# Altium PCB PCB.PcbDoc
Units mm, origin at the board's own origin, x right, y up, seen from the top; angles counter-clockwise.
Board outline 51.03 x 33.66 mm, 6 copper layers (Top Layer, Int1 (GND), Int2 (Sign), Int3 (Sign), Int4 (PWR), Bottom Layer), stack 1.551 mm thick; 35 components, 63 nets, 197 pads, 38 vias.
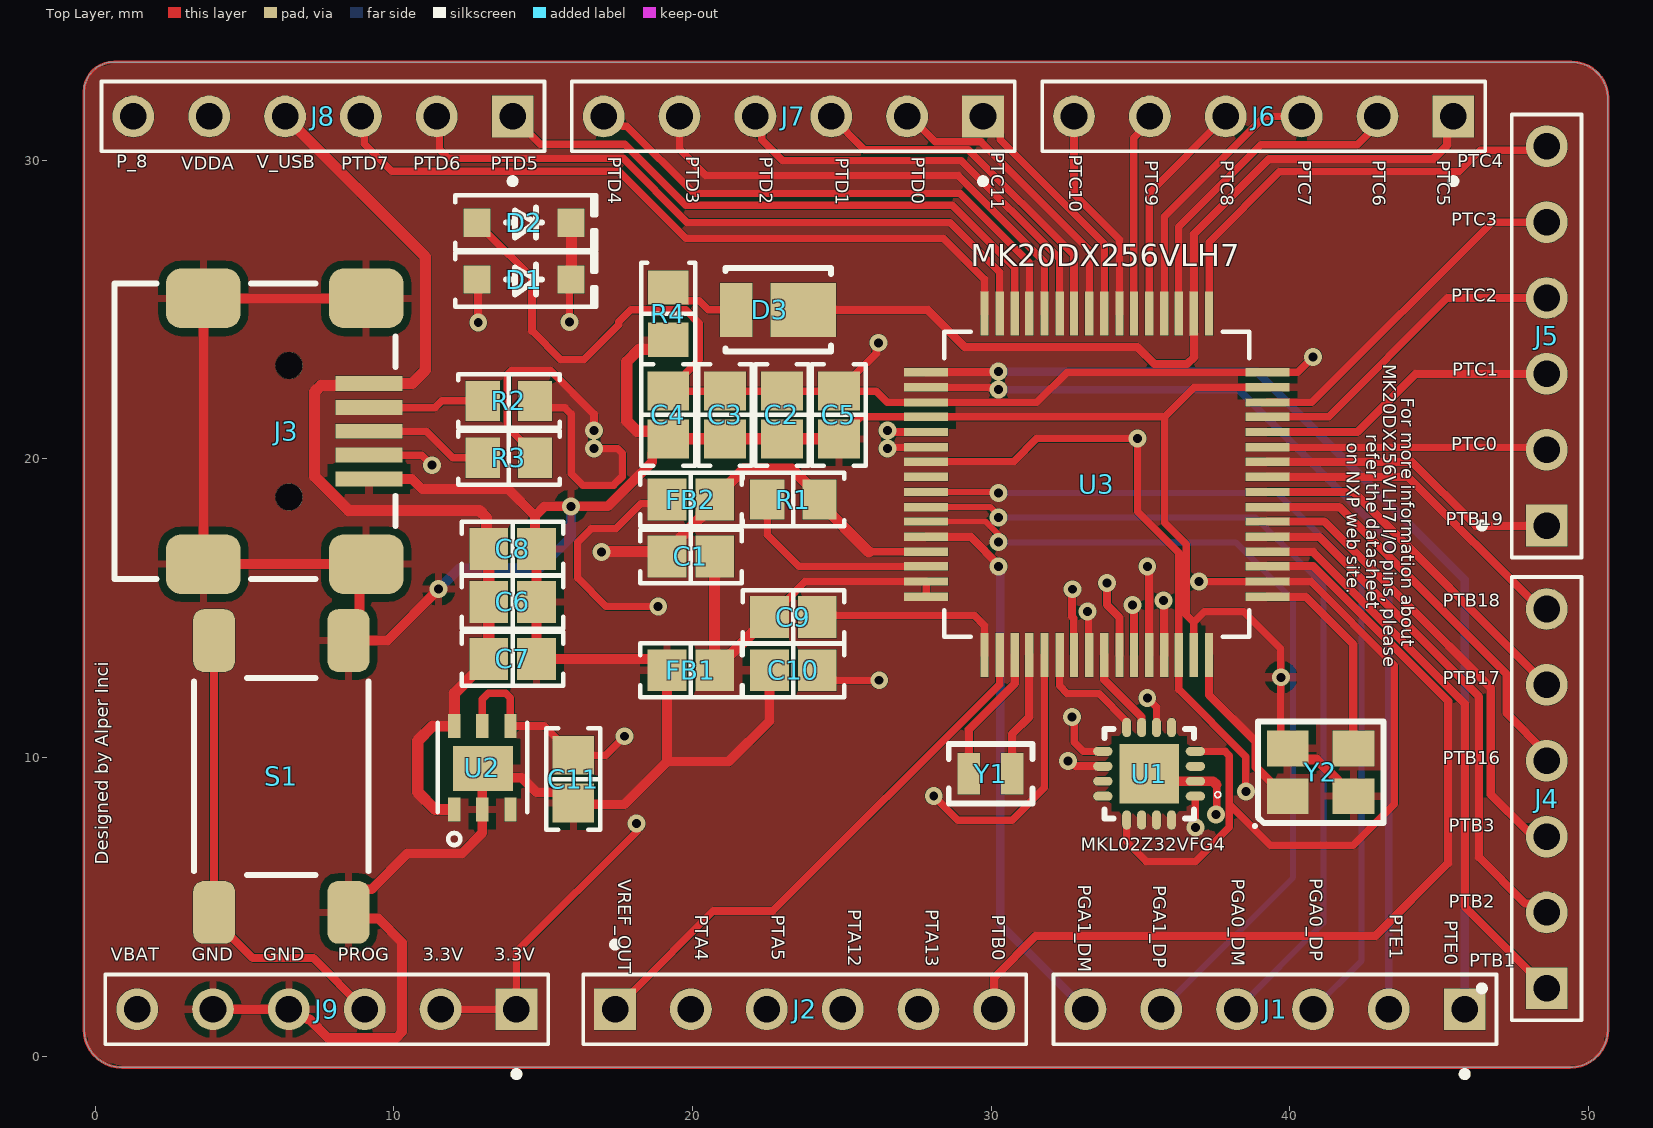
[diagram p0: Top Layer view]
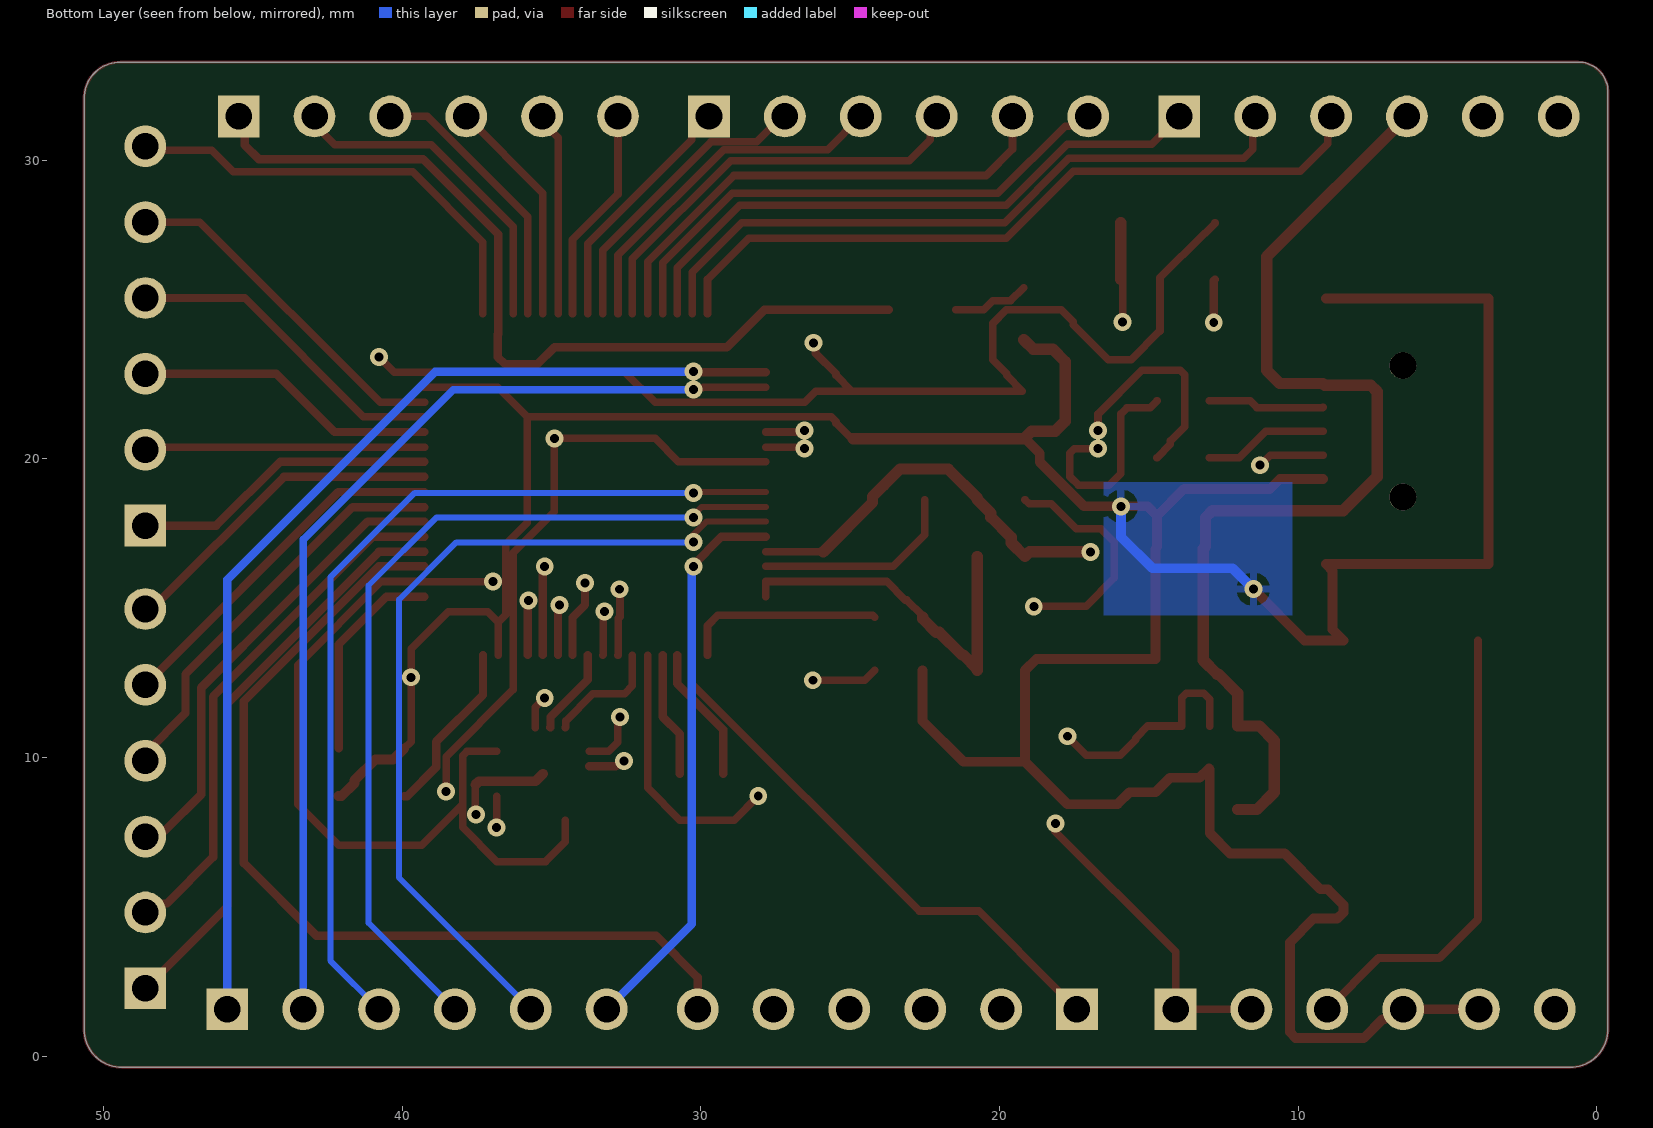
[diagram p1: Bottom Layer view, seen from below]
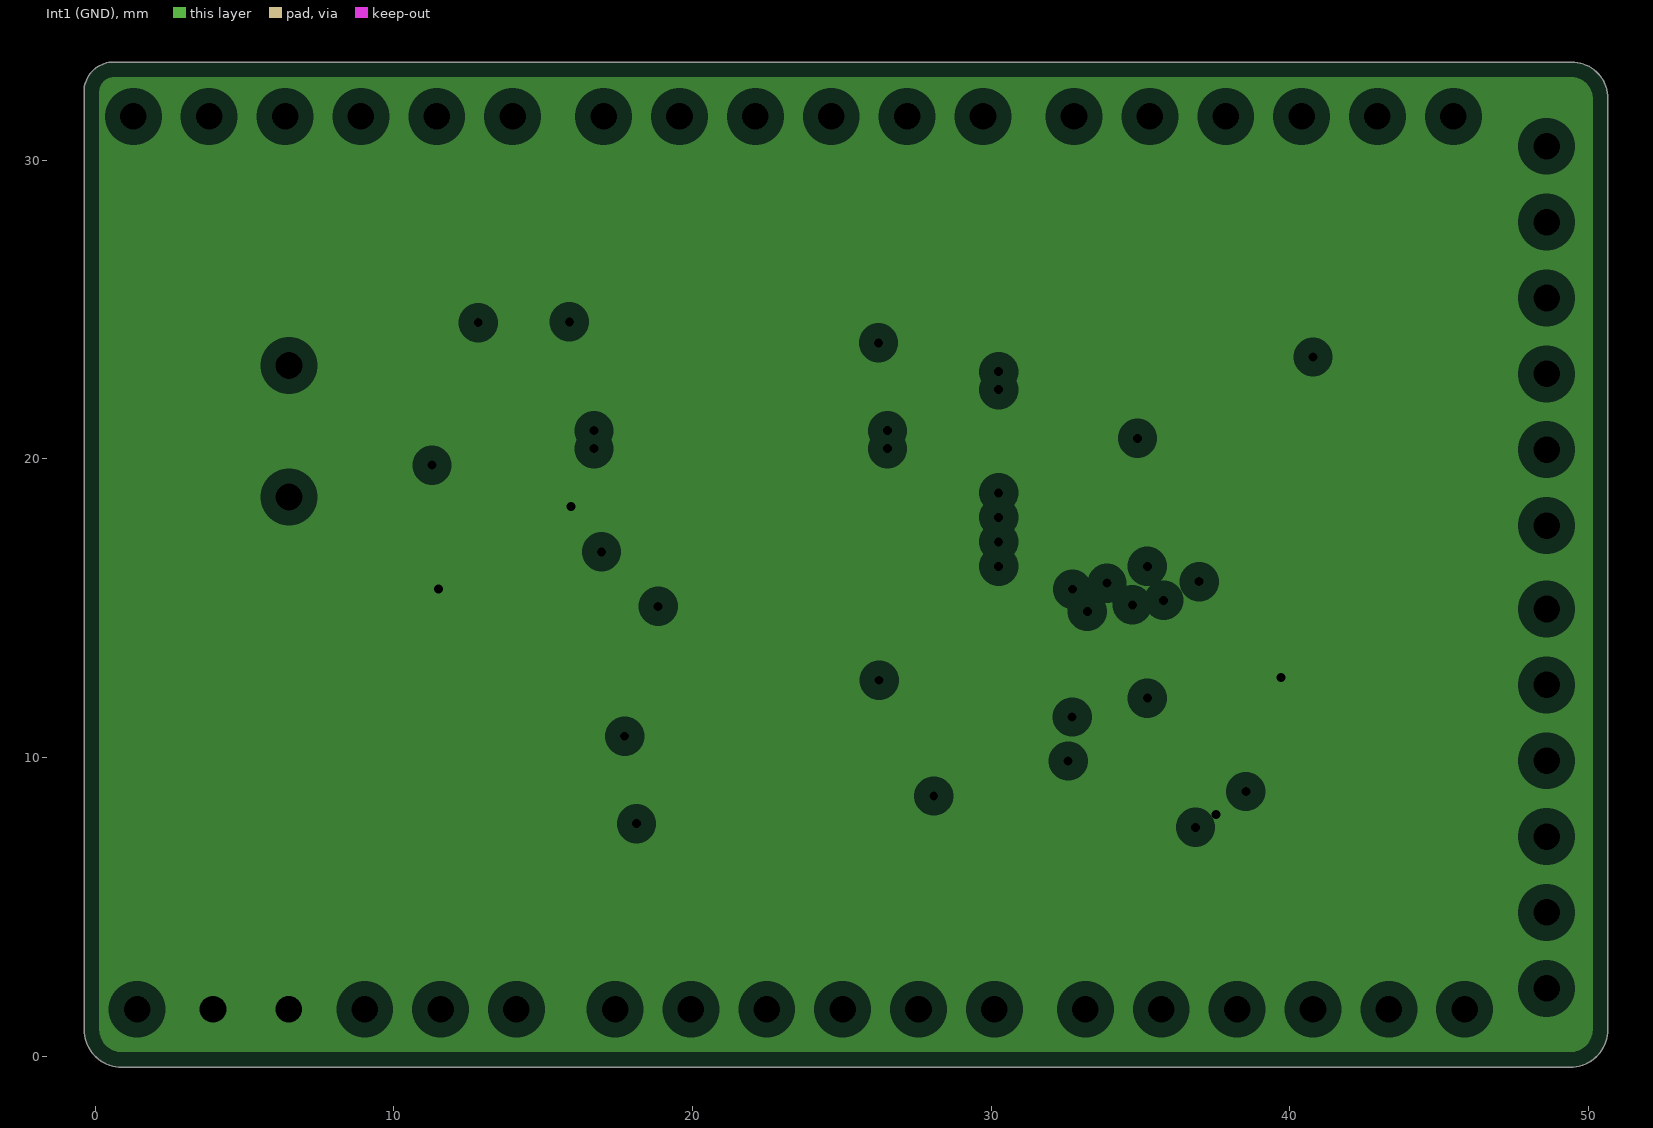
[diagram p2: Int1 (GND), clearances drawn from the general rule]
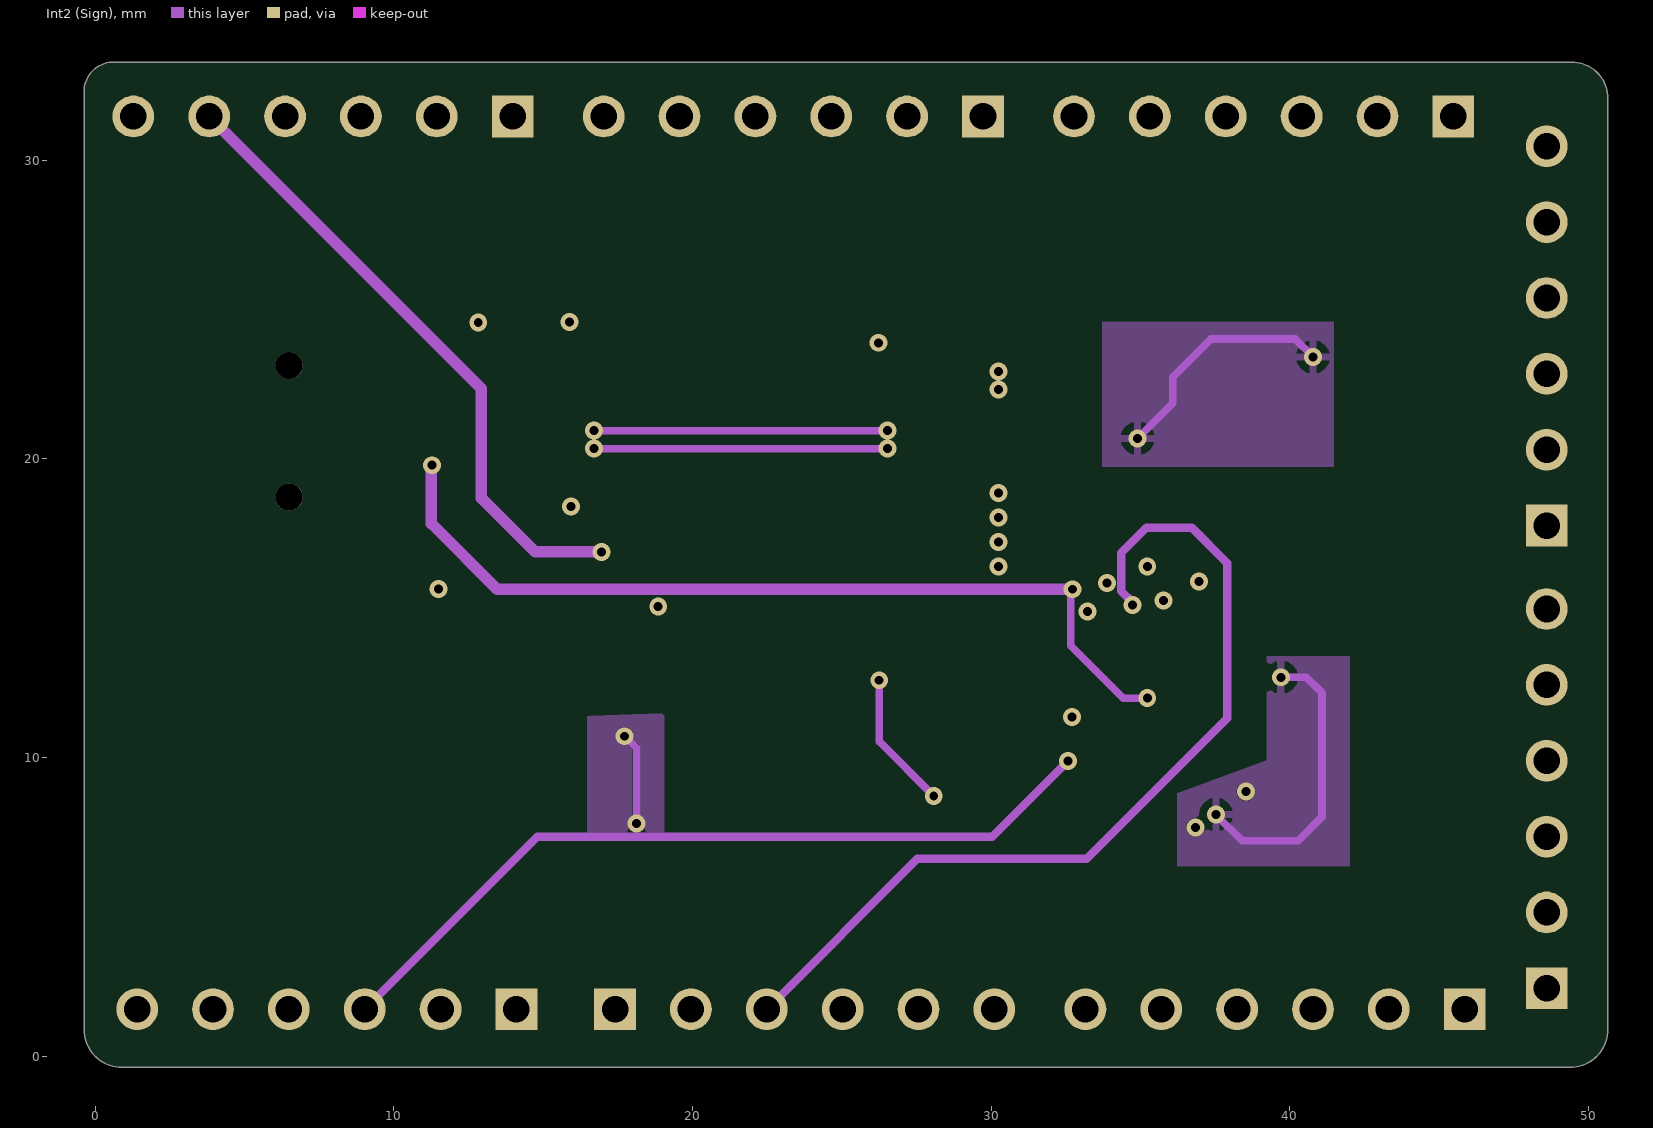
[diagram p3: Int2 (Sign)]
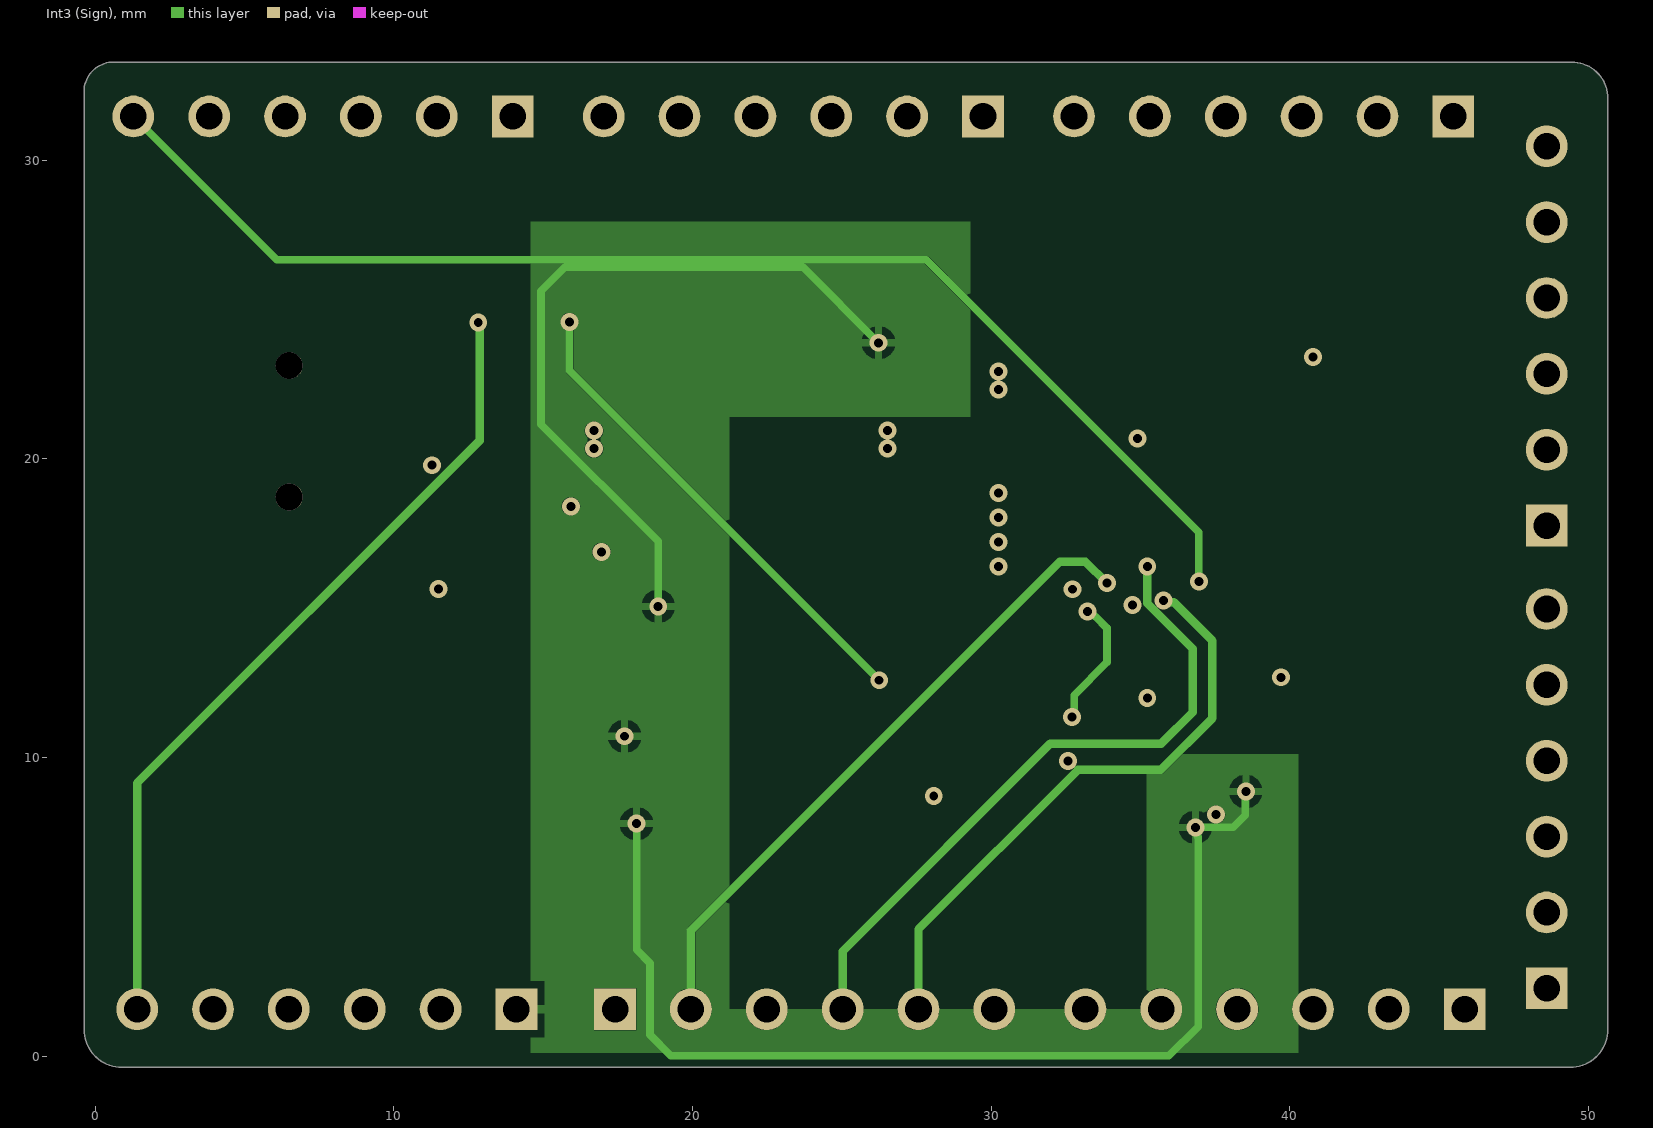
[diagram p4: Int3 (Sign)]
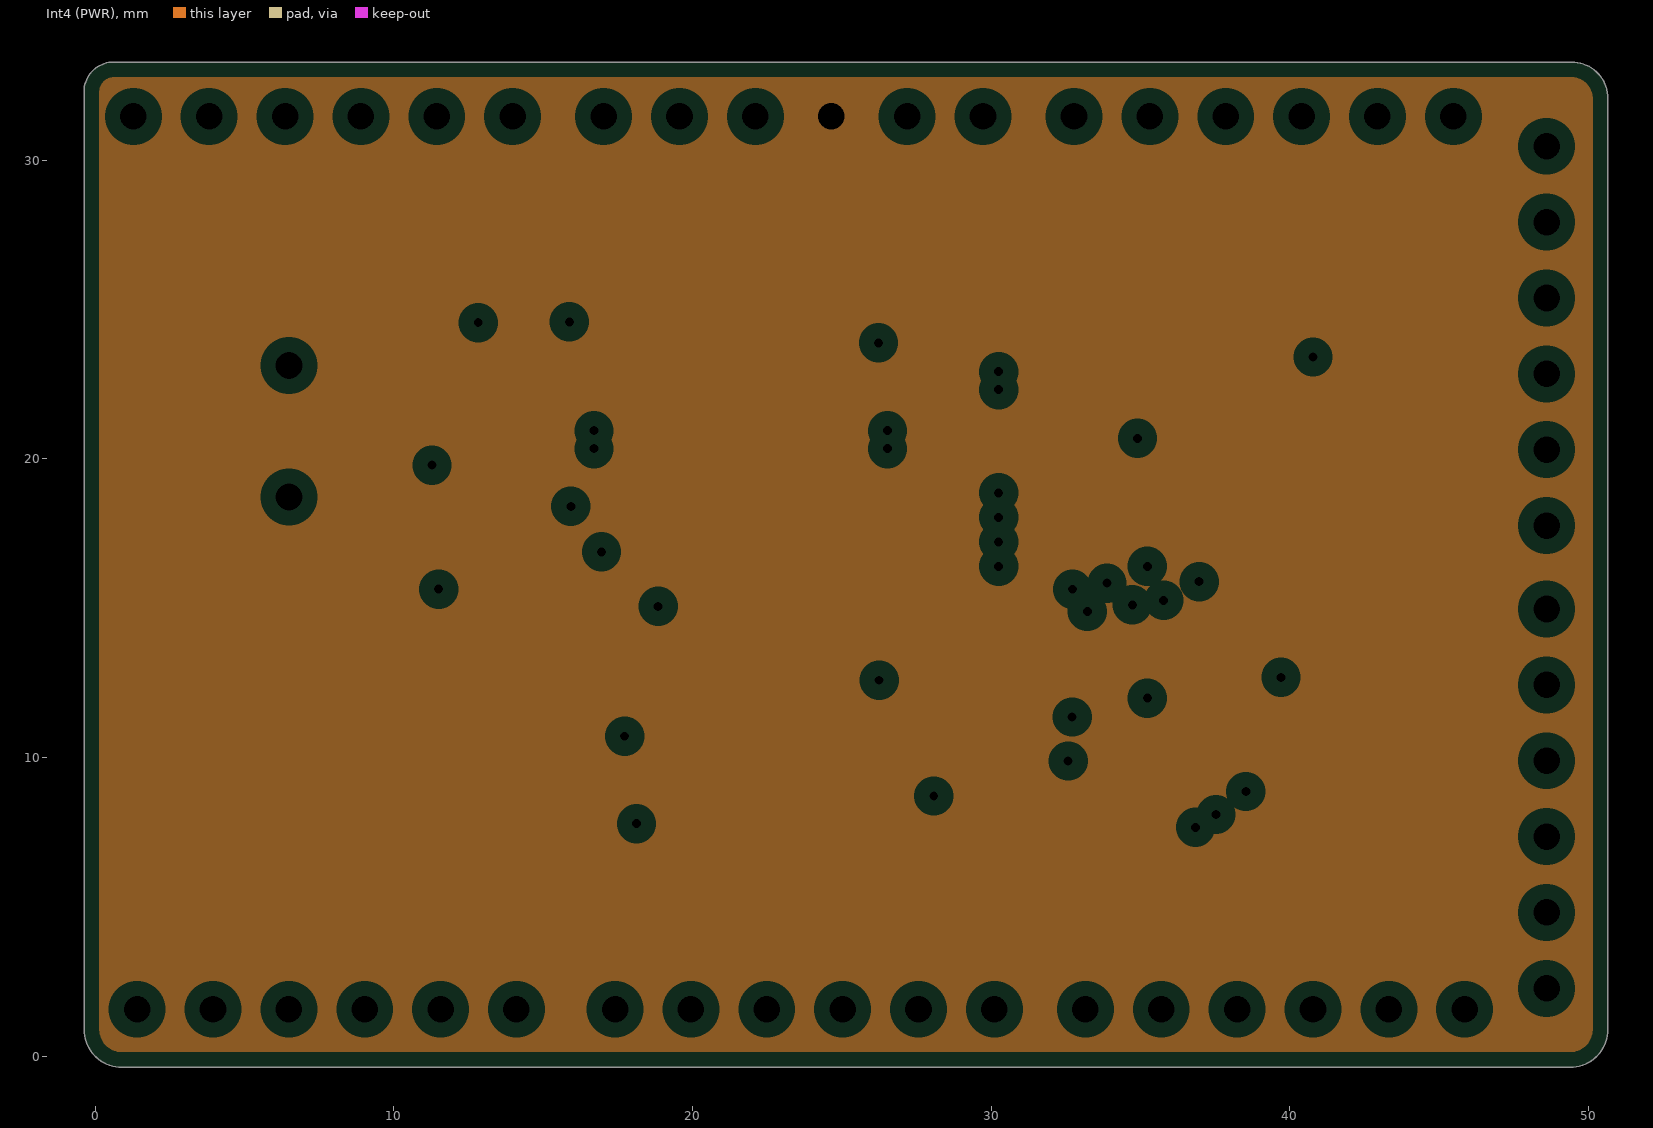
[diagram p5: Int4 (PWR), clearances drawn from the general rule]
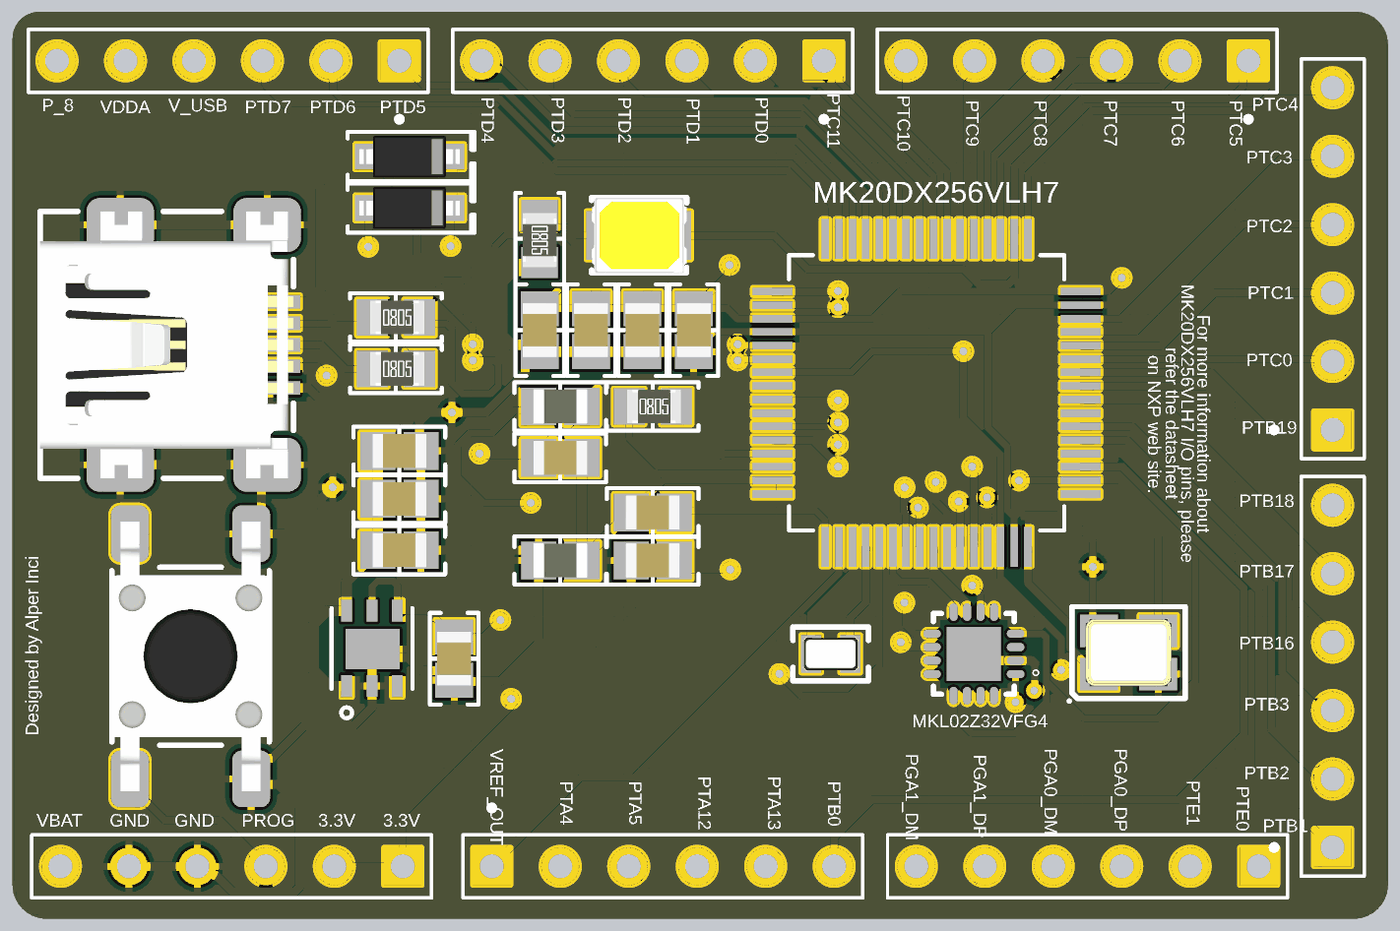
[diagram p6: 3D render of the assembled board from above, using the file's embedded part models]

## Layer stack, top to bottom
Top Solder: solder mask 0.0254, SM-001, Dk 4
Top Layer: signal copper 0.035
Dielectric 1: prepreg 0.0711, PP-006, Dk 4.1
Dielectric 2: prepreg 0.0711, PP-006, Dk 4.1
Int1 (GND): plane copper 0.035, net GND
Dielectric 3: core 0.4572, Core-035, Dk 4.7
Int2 (Sign): signal copper 0.035
Dielectric 4: prepreg 0.0711, PP-006, Dk 4.1
Dielectric 5: prepreg 0.0711, PP-006, Dk 4.1
Int3 (Sign): signal copper 0.035
Dielectric 6: core 0.4572, Core-035, Dk 4.7
Int4 (PWR): plane copper 0.035, net A0
Dielectric 7: prepreg 0.0711, PP-006, Dk 4.1
Dielectric 8: prepreg 0.0711, PP-006, Dk 4.1
Bottom Layer: signal copper 0.035
Bottom Solder: solder mask 0.0254, SM-001, Dk 4

## Board outline
-0.372,0.898 -0.372,32.293 cw(c0.625,32.293) 0.625,33.289 49.433,33.289 cw(c49.433,32.069) 50.653,32.069 50.653,0.898 cw(c49.383,0.898) 49.383,-0.372 0.898,-0.372 cw(c0.898,0.898)

## Design rules (kind name [scope] priority, off if disabled: settings)
Clearance [All] p1: gap=0.003 ignorepadtopadclearanceinfootprint=FALSE
PlaneClearance [All] p1: clearance=0.508
PlaneConnect [All] p1: planeconnectstyle=Relief reliefexpansion=0.508 reliefentries=4 reliefconductorwidth=0.254 reliefairgap=0.254
PolygonConnect [All] p1: connectstyle=Relief reliefconductorwidth=0.254 reliefentries=4 polygonreliefangle="90 Angle" airgapwidth=0.254
RoutingVias [All] p1: holewidth=0.3 width=0.6 viastyle="Through Hole" minholewidth=0.25 minwidth=0.5 maxholewidth=2.5 maxwidth=5
ShortCircuit [All] p1: allowed=TRUE
SolderMaskExpansion [All] p1: expansion=0.102 istentingtop=FALSE
Width [All] p1: maxlimit=10 minlimit=0.1 preferedwidth=0.3 midlayer1_minwidth=0.102 midlayer1_maxwidth=0.762 midlayer1_prefwidth=0.254 midlayer2_minwidth=0.102 midlayer2_maxwidth=0.762 midlayer2_prefwidth=0.254 minimp=50.000000 maximp=50.000000 favimp=50.000000
27 further rules are at their usual default settings.

## Components (designator, comment, footprint, x,y, rotation, side; value= is the part's Value field where it differs from the comment)
C1 "2.2µF" "CAP 0805_2012" 19.948,16.735 r0 top
C2 "0.1µF" "CAP 0805_2012" 22.996,21.472 r90 top
C3 "0.1µF" "CAP 0805_2012" 21.091,21.472 r90 top
C4 "0.1µF" "CAP 0805_2012" 19.186,21.472 r90 top
C5 "2.2µF" "CAP 0805_2012" 24.901,21.472 r90 top
C6 "100µF" "CAP 0805_2012" 13.979,15.211 r180 top
C7 "2.2µF" "CAP 0805_2012" 13.979,13.306 r180 top
C8 "2.2µF" "CAP 0805_2012" 13.979,16.989 r180 top
C9 "0.1µF" "CAP 0805_2012" 23.377,14.703 r180 top
C10 "0.1µF" "CAP 0805_2012" 23.377,12.925 r0 top
C11 "2.2µF" "CAP 0805_2012" 16.011,9.28 r90 top
D1 "1N4148W-TP" SOD-123 14.36,26.006 r0 top
D2 "1N4148W-TP" SOD-123 14.36,27.911 r0 top
D3 "JE2835AWT-00-0000-000A0HG830E" "CREE J 2835" 22.742,24.99 r0 top
FB1 "600 Ohms @ 100MHz" "FER 0805_2012" 19.948,12.925 r180 top
FB2 "600 Ohms @ 100MHz" "FER 0805_2012" 19.948,18.64 r0 top
J1 "4-103327-6" TE_4-103327-6 39.506,1.573 r180 top
J2 "4-103327-6" TE_4-103327-6 23.758,1.573 r0 top
J3 "10033526-N3212LF" "FCI USB 10033526-N3212LF" 5.343,20.926 r90 top
J4 "4-103327-6" TE_4-103327-6 48.6,8.625 r90 top
J5 "4-103327-6" TE_4-103327-6 48.6,24.119 r90 top
J6 "4-103327-6" TE_4-103327-6 39.125,31.467 r180 top
J7 "4-103327-6" TE_4-103327-6 23.377,31.467 r180 top
J8 "4-103327-6" TE_4-103327-6 7.629,31.467 r180 top
J9 "4-103327-6" TE_4-103327-6 7.756,1.573 r180 top
R1 "470 Ohms" "RES 0805_2012" 23.377,18.64 r0 top
R2 "33 Ohms" "RES 0805_2012" 13.852,21.942 r0 top
R3 "33 Ohms" "RES 0805_2012" 13.852,20.037 r0 top
R4 "470 Ohms" "RES 0805_2012" 19.186,24.863 r270 top
S1 "FSM6JSMATR" "TE FSM6JSMA" 6.232,9.369 r180 top
U1 "MKL02Z32VFG4" QFN50P300X300X65-17N 35.29,9.458 r180 top
U2 "LP38691SD-3.3" DFN300X300X80-7N 12.963,9.661 r90 top
U3 "MK20DX256VLH7" QFP50P1200X1200X160-64N 33.537,19.148 r0 top
Y1 "32.768kHz" "ABRACON ABS06" 29.981,9.458 r180 top
Y2 "16MHz" "NDK NX3225SA" 41.03,9.508 r0 top

## Footprints (in the part's own frame and the unit in brackets; to place one, negate y for a bottom-side part, rotate by r counter-clockwise, add the part's x,y. Pads: shape width x height; smd on the part's side, far side on the other; paste and mask are expansions set on the pad)
"ABRACON ABS06" [mm] "Crystal, 2-Leads, Body 1.20x2.00mm, Pitch 1.50mm, IPC Medium Density"
  rect 0.75x1.4 smd: 1(-0.725,0) 2(0.725,0)
  silkscreen extent -1.4,-1 1.4,1, body extent -1.02,-0.62 1.03,0.63, height 0.6
"CAP 0805_2012" [mm] "Chip Capacitor, 2-Leads, Body 2.00x1.20mm, IPC Medium Density"
  rect 1.3x1.4 smd: 1(-0.8,0) 2(0.8,0)
  silkscreen extent -1.7,-0.9 1.7,0.9, body extent -1,-0.64 1,0.64, height 1.26
"CREE J 2835" [mm] "LED, 2-Leads, Body 3.5x2.8mm, CREE JE2835AWT-00-0000-000A0ZF627E"
  rect 2.2x1.8 smd: 1(0.962,0)
  rect 1.1x1.8 smd: 2(-1.278,0)
  silkscreen extent -1.64,-1.39 1.9,1.4, body extent -1.62,-1.4 1.9,1.4, height 0.7
DFN300X300X80-7N [mil]
  rect 32x16 smd: 1(-55,37) 2(-55,0) 3(-55,-37) 4(55,-37) 5(55,0) 6(55,37)
  rect 59x79 smd: 7(-1,-1)
  silkscreen extent -102,-59 59,59
"FCI USB 10033526-N3212LF" [mm] "USB 2.0 Type B Mini"
  rect 0.5x2.25 smd: 1(1.6,-3.826) 2(0.8,-3.826) 3(0,-3.826) 4(-0.8,-3.826) 5(-1.6,-3.826)
  round 0.9 hole 0.9 unplated: M(-2.2,-1.151) M(2.2,-1.151)
  rrect50% 2x2.5 smd: S(-4.45,-3.731) S(-4.45,1.719) S(4.45,-3.731) S(4.45,1.719)
  silkscreen extent -4.95,-4.71 4.95,4.69, body extent -4.95,-4.7 4.95,4.7, height 4.01
"FER 0805_2012" [mm] "Chip Ferrite, 2-Leads, Body 2.00x1.20mm, IPC Medium Density"
  rect 1.3x1.4 smd: 1(-0.8,0) 2(0.8,0)
  silkscreen extent -1.7,-0.9 1.7,0.9, body extent -1,-0.64 1,0.64, height 1.26
"NDK NX3225SA" [mm] "Crystal, 4-Leads, Body 2.50x3.20mm, Pitch 2.20mm, IPC Medium Density"
  rect 1.4x1.2 smd: 1(-1.1,-0.8) 2(1.1,-0.8) 3(1.1,0.8) 4(-1.1,0.8)
  silkscreen extent -2.25,-1.85 2.1,1.7, body extent -1.61,-1.26 1.61,1.26, height 0.6
QFN50P300X300X65-17N [mm]
  oval 0.65x0.3 smd: 1(-1.55,0.75) 2(-1.55,0.25) 3(-1.55,-0.25) 4(-1.55,-0.75) 9(1.55,-0.75) 10(1.55,-0.25) 11(1.55,0.25) 12(1.55,0.75)
  oval 0.3x0.65 smd: 5(-0.75,-1.55) 6(-0.25,-1.55) 7(0.25,-1.55) 8(0.75,-1.55) 13(0.75,1.55) 14(0.25,1.55) 15(-0.25,1.55) 16(-0.75,1.55)
  rect 2x2 smd: 17(0,0)
  silkscreen extent -2.4,-1.5 1.5,1.5
QFP50P1200X1200X160-64N [mil]
  rect 58x11 smd: 1(-225,148) 2(-225,128) 3(-225,108) 4(-225,89) 5(-225,69) 6(-225,49) 7(-225,30) 8(-225,10) 9(-225,-10) 10(-225,-30) 11(-225,-49) 12(-225,-69) 13(-225,-89) 14(-225,-108) 15(-225,-128) 16(-225,-148) 33(225,-148) 34(225,-128) 35(225,-108) 36(225,-89) 37(225,-69) 38(225,-49) 39(225,-30) 40(225,-10) 41(225,10) 42(225,30) 43(225,49) 44(225,69) 45(225,89) 46(225,108) 47(225,128) 48(225,148)
  rect 11x58 smd: 17(-148,-225) 18(-128,-225) 19(-108,-225) 20(-89,-225) 21(-69,-225) 22(-49,-225) 23(-30,-225) 24(-10,-225) 25(10,-225) 26(30,-225) 27(49,-225) 28(69,-225) 29(89,-225) 30(108,-225) 31(128,-225) 32(148,-225) 49(148,225) 50(128,225) 51(108,225) 52(89,225) 53(69,225) 54(49,225) 55(30,225) 56(10,225) 57(-10,225) 58(-30,225) 59(-49,225) 60(-69,225) 61(-89,225) 62(-108,225) 63(-128,225) 64(-148,225)
  silkscreen extent -201,-201 201,201
"RES 0805_2012" [mm] "Chip Resistor, 2-Leads, Body 2.00x1.25mm, IPC Medium Density"
  rect 1.15x1.35 smd: 1(-0.875,0) 2(0.875,0)
  silkscreen extent -1.7,-0.9 1.7,0.9, body extent -0.95,-0.62 1.05,0.63, height 0.6
SOD-123 [mm] "SOD, 2-Leads, Body 1.55x3.70mm, IPC Medium Density"
  rect 0.9x0.95 smd: 1(-1.575,0) 2(1.575,0)
  silkscreen extent -2.3,-0.92 2.41,0.92, body extent -1.86,-0.78 1.86,0.77, height 1.35
"TE FSM6JSMA" [mm]
  rrect50% 1.4x2.1 smd: 1(2.25,4.55) 2(2.25,-4.55) 3(-2.25,4.55) 4(-2.25,-4.55)
  silkscreen extent -2.92,-3.3 2.92,3.3, body extent -3,-5 3,5, height 7.11
TE_4-103327-6 [mm]
  rect 1.398x1.398 hole 0.89: 1(-6.35,0)
  round 1.398 hole 0.89: 2(-3.81,0) 3(-1.27,0) 4(1.27,0) 5(3.81,0) 6(6.35,0)
  silkscreen extent -7.42,-1.17 7.42,2.27

## Part data
C1 C5 C7 C8 C11: library part CGA4J3X7R1H225K125AB, "CAP CER 2.2UF 50V X7R 0805", Device Package="0805 (2012 Metric)", Manufacturer="TDK Corporation", Operating Temperature="-55°C ~ 125°C", Ratings=AEC-Q200, Supplier Part Number 1=445-174216-1-ND, Temperature Coefficient=X7R, Tolerance=±10%, Voltage - Rated=50V, Applications=Automotive, Capacitance=2.2µF, ComponentLink1Description=Datasheet, ComponentLink1URL=https://product.tdk.com/info/en/catalog/datasheets/mlcc_automotive_general_en.pdf?ref_disty=digikey, ComponentLink2Description="DigiKey Link", ComponentLink2URL=http://digikey.com/product-detail/en/tdk-corporation/CGA4J3X7R1H225K125AB/445-174216-1-ND/5823086, LastUpdated="21.01.2020 00:03:05", Lifecycle Status=Active, Minimum Order=1, Mounting Type="Surface Mount, MLCC", Package / Case="0805 (2012 Metric)", Packaging=TapeAndReel, Part Number=CGA4J3X7R1H225K125AB, Part Status=Active, PartId=3113, Price=0.12, Series=CGA, Size / Dimension="0.079\" L x 0.049\" W (2.00mm x 1.25mm)", Supplier 1=DigiKey, Thickness (Max)="0.057\" (1.45mm)"
C2 C3 C4 C9 C10: library part C0805C104K1RECAUTO, "CAP CER 0805 0.1UF 100V X7R", Device Package="0805 (2012 Metric)", Manufacturer=KEMET, Operating Temperature="-55°C ~ 125°C", Ratings=AEC-Q200, Supplier Part Number 1=399-17169-1-ND, Temperature Coefficient=X7R, Tolerance=±10%, Voltage - Rated=100V, Applications="Automotive, ESD Protection", Capacitance=0.1µF, ComponentLink1Description=Datasheet, ComponentLink1URL=https://api.kemet.com/component-edge/download/datasheet/C0805C104K1RECAUTO.pdf, ComponentLink2Description="DigiKey Link", ComponentLink2URL=http://digikey.com/product-detail/en/kemet/C0805C104K1RECAUTO/399-17169-1-ND/8563710, LastUpdated="21.01.2020 00:03:01", Lifecycle Status=Active, Minimum Order=1, Mounting Type="Surface Mount, MLCC", Package / Case="0805 (2012 Metric)", Packaging=TapeAndReel, Part Number=C0805C104K1RECAUTO, Part Status=Active, PartId=5890, Price=0.06, Series="ESD SMD Auto X7R", Size / Dimension="0.079\" L x 0.049\" W (2.00mm x 1.25mm)", Supplier 1=DigiKey, Thickness (Max)="0.043\" (1.10mm)"
C6: library part GRM21BR60J107ME15L, "CAP CER 100UF 6.3V X5R 0805", Device Package="0805 (2012 Metric)", Manufacturer="Murata Electronics", Operating Temperature="-55°C ~ 85°C", Supplier Part Number 1=490-13981-1-ND, Temperature Coefficient=X5R, Tolerance=±20%, Voltage - Rated=6.3V, Applications="General Purpose", Capacitance=100µF, ComponentLink1Description=Datasheet, ComponentLink1URL=https://search.murata.co.jp/Ceramy/image/img/A01X/G101/ENG/GRM21BR60J107ME15-01.pdf, ComponentLink2Description="DigiKey Link", ComponentLink2URL=http://digikey.com/product-detail/en/murata-electronics/GRM21BR60J107ME15L/490-13981-1-ND/6155811, LastUpdated="21.01.2020 00:02:41", Lifecycle Status=Active, Minimum Order=1, Mounting Type="Surface Mount, MLCC", Package / Case="0805 (2012 Metric)", Packaging=TapeAndReel, Part Number=GRM21BR60J107ME15L, Part Status=Active, PartId=16995, Price=0.65, Series=GRM, Size / Dimension="0.079\" L x 0.049\" W (2.00mm x 1.25mm)", Supplier 1=DigiKey, Thickness (Max)="0.057\" (1.45mm)"
D1 D2: "DIODE GEN PURP 100V 150MA SOD123", Capacitance @ Vr, F="2pF @ 0V, 1MHz", Current - Average Rectified (Io)=150mA, Current - Reverse Leakage @ Vr="1µA @ 75V", Device Package=SOD-123, Manufacturer="Micro Commercial Co", Operating Temperature - Junction="-65°C ~ 150°C", Supplier Part Number 1=1N4148WTPMSCT-ND, Voltage - DC Reverse (Vr) (Max)=100V, Voltage - Forward (Vf) (Max) @ If="1.25V @ 150mA", ComponentLink1Description=Datasheet, ComponentLink1URL=https://www.mccsemi.com/pdf/Products/1N4148W(SOD123).pdf, ComponentLink2Description="DigiKey Link", ComponentLink2URL=http://digikey.com/product-detail/en/micro-commercial-co/1N4148W-TP/1N4148WTPMSCT-ND/717311, Diode Type=Standard, LastUpdated="21.01.2020 02:42:46", Lifecycle Status=Active, Minimum Order=1, Mounting Type="Surface Mount", Package / Case=SOD-123, Packaging=TapeAndReel, Part Number=1N4148W-TP, Part Status=Active, PartId=999, Price=0.02, Reverse Recovery Time (trr)=4ns, Series=-, Speed="Small Signal =< 200mA (Io), Any Speed", Supplier 1=DigiKey, Supplier Device Package=SOD-123
D3: "CREE J SERIES JE2835 LIGHT EMITT", Color="0.138\" L x 0.110\" W (3.50mm x 2.80mm)", CRI (Color Rendering Index)=80, Current - Max=240mA, Current - Test=150mA, Device Package="1113 (2835 Metric)", Flux @ 25°C, Current - Test="70lm (Typ)", Lumens/Watt @ Current - Test="156 lm/W", Manufacturer="Cree Inc.", Supplier Device Package=SMD, Supplier Part Number 1=JE2835AWT-00-0000-000A0HG830ECT-ND, Voltage - Forward (Vf) (Typ)=3V, CCT (K)=3000K, ComponentLink1Description=Datasheet, ComponentLink1URL=https://www.cree.com/led-components/media/documents/data-sheet-JSeries-2835-3v.pdf, ComponentLink2Description="DigiKey Link", ComponentLink2URL=http://digikey.com/product-detail/en/cree-inc/JE2835AWT-00-0000-000A0HG830E/JE2835AWT-00-0000-000A0HG830ECT-ND/9974552, Height - Seated (Max)="0.035\" (0.90mm)", LastUpdated="2.04.2020 13:35:29", Lifecycle Status=Active, Minimum Order=1, Mounting Type="Surface Mount", Package / Case="1113 (2835 Metric)", Packaging=TapeAndReel, Part Number=JE2835AWT-00-0000-000A0HG830E, Part Status="1113 (2835 Metric)", PartId=48, Price=0.02, Series=J, Size / Dimension="0.138\" L x 0.110\" W (3.50mm x 2.80mm)", Supplier 1=DigiKey, Viewing Angle=120°
FB1 FB2: library part MPZ2012S601AT000, "FERRITE BEAD 600 OHM 0805 1LN", Current Rating (Max)=2A, DC Resistance (DCR) (Max)=100mOhm, Device Package="0805 (2012 Metric)", Manufacturer="TDK Corporation", Operating Temperature="-55°C ~ 125°C", Supplier Part Number 1=445-2206-1-ND, ComponentLink1Description=Datasheet, ComponentLink1URL=https://product.tdk.com/info/en/catalog/datasheets/beads_commercial_power_mpz2012_en.pdf?ref_disty=digikey, ComponentLink2Description="DigiKey Link", ComponentLink2URL=http://digikey.com/product-detail/en/tdk-corporation/MPZ2012S601AT000/445-2206-1-ND/765104, Filter Type="Power Line", Height (Max)="0.041\" (1.05mm)", LastUpdated="21.01.2020 02:29:16", Lifecycle Status=Active, Minimum Order=1, Mounting Type="Surface Mount", Number of Lines=1, Package / Case="0805 (2012 Metric)", Packaging=TapeAndReel, Part Number=MPZ2012S601AT000, Part Status=Active, PartId=1392, Price=0.03, Series=MPZ, Size / Dimension="0.079\" L x 0.049\" W (2.00mm x 1.25mm)", Supplier 1=DigiKey, Impedance @ Frequency="600 Ohms @ 100MHz"
J1 J2 J4 J5 J6 J7 J8 J9: "6 Position Single Row 2.54 mm Through-Hole Straight AMPMODU Breakaway Header", Package=None, Availability=Unavailable, Centerline_Pitch="2.54 mm[.1 in]", MF="TE Connectivity", MP=4-103327-6, Number_of_Positions=6, Price=None, Product_Type=Connector, SnapEDA_Link=https://www.snapeda.com/parts/4-103327-6/TE%20Connectivity%20AMP%20Connectors/view-part/2779147/?ref=snap, TE_purchase_URL=https://www.te.com/usa-en/product-4-103327-6.html?te_bu=Cor&te_type=disp&te_campaign=seda_glo_cor-seda-global-disp-prtnr-fy19-seda-model-bom-cta_sma-317_1&elqCampaignId=32493
J3: "CONN RCPT MINI USB B 5POS SMD RA", Current Rating (Amps)="1A per Contact", Manufacturer="Amphenol ICC (FCI)", Operating Temperature="-25°C ~ 85°C", Supplier Part Number 1=609-4700-2-ND, Voltage - Rated=30V, ComponentLink1Description=Datasheet, ComponentLink1URL=http://www.amphenol-icc.com/media/wysiwyg/files/drawing/10033526.pdf, ComponentLink2Description="DigiKey Link", ComponentLink2URL=//digikey.com/product-detail/en/amphenol-icc-fci/10033526-N3212LF/609-4700-2-ND/4292074, Connector Type="USB - mini B", Features="Board Guide, Solder Retention", Gender=Receptacle, LastUpdated="9.12.2019 20:52:14", Lifecycle Status=0, Mating Cycles=5000, Minimum Order=1, Mounting Feature=Horizontal, Mounting Type="Surface Mount, Right Angle", Number of Contacts=5, Number of Ports=1, Packaging=TapeAndReel, Part Number=10033526-N3212LF, Part Status=Active, Price=0.39, Series=-, Shielding=Shielded, Supplier 1=DigiKey, Termination=Solder
R1: library part CPF0805B470RE1, "RES SMD 470 OHM 0.1% 1/10W 0805", Device Package="0805 (2012 Metric)", Manufacturer="TE Connectivity Passive Product", Operating Temperature="-55°C ~ 155°C", Power (Watts)="0.1W, 1/10W", Supplier Device Package=0805, Supplier Part Number 1=A103263CT-ND, Temperature Coefficient=±25ppm/°C, Tolerance=±0.1%, ComponentLink1Description=Datasheet, ComponentLink1URL=https://www.te.com/commerce/DocumentDelivery/DDEController?Action=srchrtrv&DocNm=1773200&DocType=DS&DocLang=English, ComponentLink2Description="DigiKey Link", ComponentLink2URL=http://digikey.com/product-detail/en/te-connectivity-passive-product/CPF0805B470RE1/A103263CT-ND/2728833, Composition="Thin Film", Height - Seated (Max)="0.026\" (0.65mm)", LastUpdated="21.01.2020 01:48:16", Lifecycle Status=Active, Minimum Order=1, Number of Terminations=2, Package / Case="0805 (2012 Metric)", Packaging=TapeAndReel, Part Number=CPF0805B470RE1, Part Status=Active, PartId=31840, Price=0.12, Resistance="470 Ohms", Series="CPF, Neohm", Size / Dimension="0.079\" L x 0.049\" W (2.00mm x 1.25mm)", Supplier 1=DigiKey
R2 R3: library part CPF0805B33RE1, "RES SMD 33 OHM 0.1% 1/10W 0805", Device Package="0805 (2012 Metric)", Manufacturer="TE Connectivity Passive Product", Operating Temperature="-55°C ~ 155°C", Power (Watts)="0.1W, 1/10W", Supplier Device Package=0805, Supplier Part Number 1=A103197CT-ND, Temperature Coefficient=±25ppm/°C, Tolerance=±0.1%, ComponentLink1Description=Datasheet, ComponentLink1URL=https://www.te.com/commerce/DocumentDelivery/DDEController?Action=srchrtrv&DocNm=1773200&DocType=DS&DocLang=English, ComponentLink2Description="DigiKey Link", ComponentLink2URL=http://digikey.com/product-detail/en/te-connectivity-passive-product/CPF0805B33RE1/A103197CT-ND/2728757, Composition="Thin Film", Height - Seated (Max)="0.026\" (0.65mm)", LastUpdated="21.01.2020 01:40:43", Lifecycle Status=Active, Minimum Order=1, Number of Terminations=2, Package / Case="0805 (2012 Metric)", Packaging=TapeAndReel, Part Number=CPF0805B33RE1, Part Status=Active, PartId=47504, Price=0.12, Resistance="33 Ohms", Series="CPF, Neohm", Size / Dimension="0.079\" L x 0.049\" W (2.00mm x 1.25mm)", Supplier 1=DigiKey
R4: library part RMCF0805FT470R, "RES 470 OHM 1% 1/8W 0805", Device Package="0805 (2012 Metric)", Manufacturer="Stackpole Electronics Inc", Operating Temperature="-55°C ~ 155°C", Power (Watts)="0.125W, 1/8W", Ratings=AEC-Q200, Supplier Device Package=0805, Supplier Part Number 1=RMCF0805FT470RCT-ND, Temperature Coefficient=±100ppm/°C, Tolerance=±1%, ComponentLink1Description=Datasheet, ComponentLink1URL=https://www.seielect.com/catalog/sei-packaging.pdf, ComponentLink2Description="DigiKey Link", ComponentLink2URL=http://digikey.com/product-detail/en/stackpole-electronics-inc/RMCF0805FT470R/RMCF0805FT470RCT-ND/1942356, Composition="Thick Film", Features="Automotive AEC-Q200", Height - Seated (Max)="0.026\" (0.65mm)", LastUpdated="21.01.2020 01:48:04", Lifecycle Status=Active, Minimum Order=1, Number of Terminations=2, Package / Case="0805 (2012 Metric)", Packaging=CutTape, Part Number=RMCF0805FT470R, Part Status=Active, PartId=32394, Price=0.10, Resistance="470 Ohms", Series=RMCF, Size / Dimension="0.079\" L x 0.049\" W (2.00mm x 1.25mm)", Supplier 1=DigiKey
S1: "SWITCH TACTILE SPST-NO 0.05A 24V", Contact Rating @ Voltage="0.05A @ 24VDC", Manufacturer="TE Connectivity ALCOSWITCH Switches", Operating Force=160gf, Operating Temperature="-35°C ~ 85°C", Supplier Part Number 1=450-2058-1-ND, Actuator Height off PCB, Vertical=7.00mm, Actuator Orientation="Top Actuated", Actuator Type=Standard, Circuit=SPST-NO, ComponentLink1Description=Datasheet, ComponentLink1URL=https://www.te.com/commerce/DocumentDelivery/DDEController?Action=srchrtrv&DocNm=1308111-1_SWITCHES_CORE_PROGRAM_CATALOG&DocType=CS&DocLang=English, ComponentLink2Description="DigiKey Link", ComponentLink2URL=http://digikey.com/product-detail/en/te-connectivity-alcoswitch-switches/FSM6JSMATR/450-2058-1-ND/4569748, LastUpdated="4.02.2020 14:39:39", Lifecycle Status=Active, Minimum Order=1, Mounting Type="Surface Mount", Outline="6.00mm x 6.00mm", Packaging=TapeAndReel, Part Number=FSM6JSMATR, Part Status=Active, Price=0.25, Series=FSMJSMA, Supplier 1=DigiKey, Switch Function=Off-Mom, Termination Style="Gull Wing", Illumination=Non-Illuminated
U1: "IC MCU 32BIT 32KB FLASH 16QFN", Case/Package=QFN, Frequency=48MHz, Manufacturer="NXP Freescale", Max Operating Temperature=105°C, Max Supply Voltage=3.6V, Min Operating Temperature=-40°C, Min Supply Voltage=1.71V, Package="QFN-16 NXP Semiconductors", Package Quantity=490, Supplier Part Number 1=841-MKL02Z32VFG4, Availability=Unavailable, Category=Microcontrollers, ComponentLink1Description=https://datasheet.ciiva.com/18627/kl02p32m48sf0-18627235.pdf?src-supplier=Digi-Key, ComponentLink1URL=https://datasheet.ciiva.com/18627/kl02p32m48sf0-18627235.pdf?src-supplier=Digi-Key, ComponentLink2Description=https://datasheet.ciiva.com/30476/0900766b812babaa-30476287.pdf?src-supplier=RSComponents, ComponentLink2URL=https://datasheet.ciiva.com/30476/0900766b812babaa-30476287.pdf?src-supplier=RSComponents, ComponentLink3Description=https://datasheet.ciiva.com/46450/1816137-46450442.pdf?src-supplier=Element14, ComponentLink3URL=https://datasheet.ciiva.com/46450/1816137-46450442.pdf?src-supplier=Element14, Core Architecture=ARM, Data Bus Width=32b, Height=0.75mm, Length=3mm, Manufacturer Part Number=MKL02Z32VFG4, Max Frequency=48MHz, Memory Size=32KB, Memory Type=FLASH, MF="NXP USA", Mount="Surface Mount", MP=MKL02Z32VFG4, Number of ADC Channels=1, Number of Pins=16, Number of PWM Channels=2, Number of SPI Channels=1, Number of Timers/Counters=2, Number of UART Channels=1, Number of USB Channels=1, Number of I2C Channels=2, Number of I/Os=14, Oscillator Type=Internal, Packaging=Tray, Peripherals="Brown-out Detect/Reset,POR,PWM,WDT,LVD", Price=None, Pricing 1="1=2.49000, 10=2.12000, 100=1.69000, 500=1.48000, 1000=1.22000, 2500=1.14000 (USD)", RAM Size=4KB, REACH SVHC="No SVHC", RoHS=Yes, SnapEDA_Link=https://www.snapeda.com/parts/MKL02Z32VFG4/NXP%20USA%20Inc./view-part/492537/?ref=snap, Stock 1=3878, Supplier 1=Mouser, Weight=0.000564oz, Width=3mm, Interface=I2C,SPI,UART,USART
U2: "IC REG LINEAR 3.3V 500MA 6WSON", Dropout Voltage=330mV, Manufacturer="TI National Semiconductor", Manufacturer Part Number=LP38691SD-3.3/NOPB, Max Operating Temperature=125°C, Max Output Current=500mA, Max Input Voltage=10V, Min Operating Temperature=-40°C, Min Input Voltage=2.7V, Nominal Output Voltage=3.3V, Output Voltage Accuracy=2%, Package="WDFN-6 Texas Instruments", Package Quantity=1000, Quiescent Current=100uA, Supplier Part Number 1=841-MKL02Z32VFG4, Accuracy=2%, Availability=Unavailable, Category="Voltage Regulators - Linear", ComponentLink1Description=https://datasheet.ciiva.com/25626/0900766b810fa755-25626721.pdf?src-supplier=RSComponents, ComponentLink1URL=https://datasheet.ciiva.com/25626/0900766b810fa755-25626721.pdf?src-supplier=RSComponents, ComponentLink2Description=https://datasheet.ciiva.com/3223/lp38693-3223928.pdf?src-supplier=Avnet, ComponentLink2URL=https://datasheet.ciiva.com/3223/lp38693-3223928.pdf?src-supplier=Avnet, ComponentLink3Description=https://datasheet.ciiva.com/3223/lp38693-3223929.pdf?src-supplier=Avnet, ComponentLink3URL=https://datasheet.ciiva.com/3223/lp38693-3223929.pdf?src-supplier=Avnet, ComponentLink4Description=https://datasheet.ciiva.com/6596/lp38691-6596239.pdf?src-supplier=Digi-Key, ComponentLink4URL=https://datasheet.ciiva.com/6596/lp38691-6596239.pdf?src-supplier=Digi-Key, ComponentLink5Description=https://datasheet.ciiva.com/46385/1887481-46385397.pdf?src-supplier=Element14, ComponentLink5URL=https://datasheet.ciiva.com/46385/1887481-46385397.pdf?src-supplier=Element14, ComponentLink6Description=https://datasheet.ciiva.com/28643/1887481-28643014.pdf?src-supplier=Element14, ComponentLink6URL=https://datasheet.ciiva.com/28643/1887481-28643014.pdf?src-supplier=Element14, ComponentLink7Description=https://datasheet.ciiva.com/6596/lp38691-6596237.pdf?src-supplier=Digi-Key, ComponentLink7URL=https://datasheet.ciiva.com/6596/lp38691-6596237.pdf?src-supplier=Digi-Key, Contact Plating=Tin, Height=0.86mm, Lead Free="Lead Free", Length=3mm, MF="Texas Instruments", Mount="Surface Mount", MP=LP38691SD-3.3, Number of Outputs=1, Number of Pins=6, Number of Regulators=1, Output Current=500mA, Output Type=Fixed, Output Voltage=3.3V, Packaging="Tape and Reel", Polarity=Positive, Price=None, Pricing 2="1=1.70000, 10=1.44000, 100=1.15000, 250=1.01000, 500=0.97800, 1000=0.77700 (USD)", Radiation Hardening=No, REACH SVHC="No SVHC", RoHS=Yes, SnapEDA_Link=https://www.snapeda.com/parts/LP38691SD-3.3/Texas%20Instruments/view-part/569979/?ref=snap, Stock 2=6886, Supplier 1=Mouser, Supplier 2=Mouser, Supplier Part Number 2=926-38691SD-3.3/NOPB, Width=3mm
U3: "MCU, 32BIT, CORTEX-M4, 72MHZ, LQFP-64; Architecture:ARM Cortex-M4; CPU Speed:72MHz; Program Memory Size:256KB; RAM Memory Size:64KB; No. of Pins:64; MCU Case Style:LQFP; No. of I/Os:40; Embedded Interface Type:CAN, I2C, I2S, SPI, ;RoHS Compliant: Yes", Case/Package=LQFP, Frequency=72MHz, Manufacturer="NXP Freescale", Max Operating Temperature=105°C, Max Supply Voltage=3.6V, Min Operating Temperature=-40°C, Min Supply Voltage=1.71V, Package="LQFP-64 NXP Semiconductors", Package Quantity=160, Supplier Part Number 1=841-MK20DX256VLH7, Availability=Unavailable, Category=Microcontrollers, ComponentLink1Description=https://datasheet.ciiva.com/4842/k20pb-41960-4842272.pdf?src-supplier=Mouser, ComponentLink1URL=https://datasheet.ciiva.com/4842/k20pb-41960-4842272.pdf?src-supplier=Mouser, ComponentLink2Description=https://datasheet.ciiva.com/30475/0900766b812ba3f0-30475861.pdf?src-supplier=RSComponents, ComponentLink2URL=https://datasheet.ciiva.com/30475/0900766b812ba3f0-30475861.pdf?src-supplier=RSComponents, ComponentLink3Description=https://datasheet.ciiva.com/9232/k20p64m72sf1-9232727.pdf?src-supplier=Avnet, ComponentLink3URL=https://datasheet.ciiva.com/9232/k20p64m72sf1-9232727.pdf?src-supplier=Avnet, Contact Plating=Tin,Matte, Core Architecture=ARM, Data Bus Width=32b, Halogen Free="Halogen Free", Height=1.6mm, Lead Free="Lead Free", Length=10mm, Manufacturer Part Number=MK20DX256VLH7, Max Frequency=72MHz, Memory Size=256KB, Memory Type=FLASH, MF="NXP USA", Mount="Surface Mount", MP=MK20DX256VLH7, Number of ADC Channels=2, Number of Pins=64, Number of PWM Channels=8, Number of SPI Channels=1, Number of Timers/Counters=14, Number of UART Channels=3, Number of USB Channels=1, Number of I2C Channels=2, Number of I/Os=40, Oscillator Type=Internal, Packaging=Tray, Peripherals=POR,PWM,WDT,DMA,LVD,I2C, Price=None, Pricing 1="1=8.66000, 10=7.82000, 25=7.46000, 100=6.45000, 250=6.19000, 500=5.64000 (USD)", Radiation Hardening=No, RAM Size=64KB, REACH SVHC="No SVHC", RoHS=Yes, SnapEDA_Link=https://www.snapeda.com/parts/MK20DX256VLH7/NXP%20USA%20Inc./view-part/625714/?ref=snap, Stock 1=1822, Supplier 1=Mouser, Watchdog Timer=Yes, Weight=0.012224oz, Width=10mm, Interface=I2C,SPI,USB,CAN,IrDA,UART,USART,EBI/EMI,I2S
Y1: library part ABS06-32.768KHZ-1-T, "CRYSTAL 32.7680KHZ 12.5PF SMD", Device Package="2-SMD, No Lead", ESR (Equivalent Series Resistance)="90 kOhms", Frequency Tolerance=±10ppm, Load Capacitance=12.5pF, Manufacturer="Abracon LLC", Operating Mode=Fundamental, Operating Temperature="-40°C ~ 85°C", Supplier Part Number 1=535-10248-1-ND, ComponentLink1Description=Datasheet, ComponentLink1URL=https://abracon.com/Resonators/ABS06.pdf, ComponentLink2Description="DigiKey Link", ComponentLink2URL=http://digikey.com/product-detail/en/abracon-llc/ABS06-32.768KHZ-1-T/535-10248-1-ND/2218061, Frequency=32.768kHz, Height - Seated (Max)="0.024\" (0.60mm)", LastUpdated="21.01.2020 03:21:15", Lifecycle Status=Active, Minimum Order=1, Mounting Type="Surface Mount", Package / Case="2-SMD, No Lead", Packaging=CutTape, Part Number=ABS06-32.768KHZ-1-T, Part Status=Active, PartId=370, Price=0.80, Series=ABS06, Size / Dimension="0.079\" L x 0.047\" W (2.00mm x 1.20mm)", Supplier 1=DigiKey, Type="kHz Crystal (Tuning Fork)"
Y2: library part NX3225SA-16.000M-STD-CSR-1, "CRYSTAL 16.0000MHZ 8PF SMD", Device Package="4-SMD, No Lead", ESR (Equivalent Series Resistance)="80 Ohms", Frequency Stability=±15ppm, Load Capacitance=8pF, Manufacturer="NDK America, Inc.", Operating Mode=Fundamental, Operating Temperature="-10°C ~ 75°C", Supplier Part Number 1=644-1049-1-ND, ComponentLink1Description=Datasheet, ComponentLink1URL=//media.digikey.com/pdf/Data%20Sheets/NDK%20PDFs/NX3225SA.pdf, ComponentLink2Description="DigiKey Link", ComponentLink2URL=http://digikey.com/product-detail/en/ndk-america-inc/NX3225SA-16.000M-STD-CSR-1/644-1049-1-ND/1128921, Frequency=16MHz, Frequency Tolerance=±15ppm, Height - Seated (Max)="0.024\" (0.60mm)", LastUpdated="21.01.2020 03:23:16", Lifecycle Status=Active, Minimum Order=1, Mounting Type="Surface Mount", Package / Case="4-SMD, No Lead", Packaging=TapeAndReel, Part Number=NX3225SA-16.000M-STD-CSR-1, Part Status=Active, PartId=582, Price=0.38, Series=NX3225SA, Size / Dimension="0.126\" L x 0.098\" W (3.20mm x 2.50mm)", Supplier 1=DigiKey, Type="MHz Crystal"

## Via types
v1: diameter 0.6, hole 0.3, Top Layer to Bottom Layer, 38 vias

## Nets (pads, with @x,y where several pads share a name; then routed paths per layer and width w, separated by ;. In a path a pad name is that pad's centre, name@x,y a point inside that pad or via, vN(x,y) a via of type N, cw(c..) or ccw(c..) an arc to the next point about the centre after c; other vN are vias at no path point)
+3V3: C2.2 C3.2 C4.2 C5.2 C11.2 D2.1 FB2.1 J9.1 J9.2 U1.1 U2.4 U2.5 U3.3 U3.7 U3.30 U3.48 | length 157.3
  Top Layer w0.254: J9.2 J9.1 14.106,3.492 v1@18.148,7.534 ; D2.1 12.785,27.886 13.108,27.563 13.133,27.563 14.628,26.068 14.628,24.285 15.593,23.32 16.353,23.32 17.528,24.495 17.528,24.589 17.929,24.99 19.778,24.99 20.234,24.535 20.234,23.32 19.759,22.845 19.759,22.795 19.236,22.272 C3.2 C2.2 C5.2 C5.2@24.951,22.272 ; U2.5 12.963,11.949 13.164,12.151 13.754,12.151 13.903,12.002 U2.4 15.033,11.058 15.438,10.653 15.438,10.603 15.961,10.08 C11.2 17.094,10.08 v1(17.728,10.714) ; v1(18.853,15.064) 17.103,15.064 16.153,16.014 16.153,17.214 16.603,17.664 17.43,17.664 18.266,18.5 19.008,18.5 FB2.1 ; v1(26.228,23.889) 26.162,23.823 26.162,23.533 25.474,22.845 25.474,22.795 C5.2@24.951,22.272 ; U3.7 30.749,19.91 31.528,20.689 v1(34.903,20.689) 34.903,18.229 36.28,16.852 U3.30 36.28,12.281 38.528,10.033 v1@38.528,8.939 ; v1(36.84,7.664) U1.1 ; v1(40.778,23.414) 40.271,22.908 U3.48 32.544,22.908 31.528,21.892 U3.3 26.528,21.892 26.147,22.272 C5.2@24.951,22.272
  Int2 (Sign) w0.254: v1(17.728,10.714) 18.128,10.314 v1(18.128,7.789) ; v1(34.903,20.689) 36.078,21.864 36.078,22.739 37.353,24.014 40.178,24.014 v1(40.778,23.414)
  Int3 (Sign) w0.254: v1(18.128,7.789) 18.128,3.564 18.578,3.114 18.578,0.714 19.278,0.014 35.953,0.014 36.928,0.989 36.928,7.343 36.906,7.365 36.906,7.598 v1(36.84,7.664) 38.103,7.664 38.503,8.064 38.503,8.839 v1(38.528,8.864) ; v1(18.853,15.064) 18.853,17.239 14.928,21.164 14.928,25.614 15.728,26.414 23.703,26.414 v1(26.228,23.889)
A0: J7.3 U3.58 | length 12
  Top Layer w0.254: J7.3 25.757,30.358 29.235,30.358 32.775,26.817 U3.58
A1: J5.2 U3.43 | length 9.4
  Top Layer w0.254: U3.43 48.516,20.393 J5.2
A2: J2.6 U3.35 | length 31.2
  Top Layer w0.279: J2.6 30.108,2.644 31.503,4.039 42.878,4.039 45.303,6.464 45.303,11.889 40.787,16.405 U3.35
A3: J4.1 U3.36 | length 19.4
  Top Layer w0.279: U3.36 40.78,16.888 45.856,11.811 45.856,5.019 J4.1
A4: J4.3 U3.38 | length 15.8
  Top Layer w0.279: U3.38 41.158,17.904 43.873,15.189 43.878,15.189 46.728,12.339 46.728,8.764 47.923,7.569 48.386,7.569 J4.3
A5: J4.2 U3.37 | length 17.7
  Top Layer w0.279: U3.37 40.972,17.396 46.328,12.039 46.328,6.664 47.877,5.115 47.998,5.115 48.297,4.815 J4.2
A6: J8.1 U3.62 | length 20.4
  Top Layer w0.254: J8.1 14.907,30.539 17.728,30.539 19.778,28.489 28.703,28.489 30.794,26.399 U3.62
A7: J8.2 U3.63 | length 23
  Top Layer w0.254: J8.2 11.528,31.378 11.528,30.364 11.828,30.064 17.678,30.064 19.828,27.914 28.628,27.914 30.286,26.257 U3.63
A8: J5.3 U3.44 | length 10.2
  Top Layer w0.279: U3.44 42.265,20.901 44.213,22.849 J5.3
A9: J5.4 U3.45 | length 11
  Top Layer w0.254: U3.45 41.298,21.409 45.278,25.389 J5.4
A10: J1.3 U3.9 | length 31
  Top Layer w0.203: U3.9 30.323,18.894 v1@30.353,18.864
  Bottom Layer w0.203: v1(30.253,18.864) 39.578,18.864 42.403,16.039 42.403,3.2 J1.3
A11: J1.4 U3.10 | length 29.8
  Top Layer w0.203: U3.10 29.986,18.386 30.208,18.164 v1@30.303,18.164
  Bottom Layer w0.203: v1(30.253,18.045) 38.845,18.045 41.128,15.761 41.128,4.465 J1.4
A12: J1.5 U3.11 | length 28.8
  Top Layer w0.203: U3.11 29.814,17.904 30.278,17.439 v1@30.278,17.364
  Bottom Layer w0.203: v1@30.353,17.125 30.434,17.206 38.186,17.206 40.107,15.285 40.107,5.985 J1.5
  other v1: 30.253,17.225
A13: J1.6 U3.12 | length 18.9
  Top Layer w0.279: U3.12 29.312,17.396 v1@30.303,16.405
  Bottom Layer w0.279: v1@30.303,16.405 30.303,4.426 J1.6
  other v1: 30.253,16.405
A14: J2.1 U3.18 | length 18.4
  Top Layer w0.254: J2.1 17.98,2.145 20.699,4.864 22.692,4.864 30.286,12.458 U3.18
B0: J4.4 U3.39 | length 13.8
  Top Layer w0.279: U3.39 41.658,18.386 47.253,12.792 47.253,11.489 48.6,10.142 J4.4
B1: J4.5 U3.40 | length 12
  Top Layer w0.279: U3.40 42.141,18.894 J4.5
B2: J7.2 U3.57 | length 10.1
  Top Layer w0.254: J7.2 27.275,31.467 28.128,30.614 29.659,30.614 33.283,26.991 U3.57
B3: J2.4 U3.28 | length 25.5
  Top Layer w0.279: v1(35.228,16.405) 35.228,16.318 35.29,16.257 U3.28
  Int3 (Sign) w0.279: J2.4 25.028,3.514 31.978,10.464 35.694,10.464 36.753,11.524 36.753,13.639 35.228,15.164 v1(35.228,16.405)
B4: J2.5 U3.29 | length 22.1
  Top Layer w0.279: v1(35.778,15.264) 35.798,15.245 U3.29
  Int3 (Sign) w0.279: J2.5 27.568,4.254 32.903,9.589 35.678,9.589 37.403,11.314 37.403,13.914 36.114,15.203 35.839,15.203 v1(35.778,15.264)
B5: J8.3 U3.64 | length 24.8
  Top Layer w0.254: J8.3 9.009,31.357 9.009,30.558 9.928,29.639 17.528,29.639 19.778,27.389 28.403,27.389 29.703,26.089 29.778,26.015 U3.64
B6: J7.6 U3.61 | length 18
  Top Layer w0.254: J7.6 17.337,31.467 17.665,31.139 17.803,31.139 20.053,28.889 28.953,28.889 31.276,26.566 U3.61
B7: J7.4 U3.59 | length 14.3
  Top Layer w0.254: J7.4 22.326,31.248 22.326,30.691 23.028,29.989 29.003,29.989 32.292,26.7 U3.59
B8: J7.5 U3.60 | length 16.6
  Top Layer w0.254: J7.5 19.567,30.375 20.453,29.489 28.903,29.489 31.784,26.608 U3.60
B9: J5.5 U3.46 | length 11.8
  Top Layer w0.254: U3.46 40.739,21.892 46.777,27.929 J5.5
B10: J5.6 U3.49 | length 15
  Top Layer w0.254: U3.49 37.296,27.258 39.653,29.614 45.653,29.614 46.378,30.339 48.47,30.339 J5.6
B11: J6.2 U3.51 | length 11.2
  Top Layer w0.254: U3.51 36.28,27.767 39.028,30.514 42.253,30.514 42.935,31.196 J6.2
B12: J6.3 U3.52 | length 9.2
  Top Layer w0.254: U3.52 35.798,28.109 39.156,31.467 J6.3
C0: J2.3 U3.27 | length 32.6
  Top Layer w0.279: v1(34.728,15.114) 34.782,15.061 U3.27
  Int2 (Sign) w0.279: J2.3 27.529,6.614 33.203,6.614 37.903,11.314 37.903,16.514 36.717,17.701 35.204,17.701 34.353,16.85 34.353,15.576 34.728,15.201 v1(34.728,15.114)
C1: J5.1 U3.42 | length 10.2
  Top Layer w0.279: U3.42 44.082,19.91 46.228,17.764 48.595,17.764 J5.1
C2: J1.2 U3.2 | length 33.3
  Top Layer w0.254: U3.2 29.924,22.4 29.936,22.387 30.187,22.387 v1(30.253,22.321)
  Bottom Layer w0.254: v1(30.253,22.321) 38.296,22.321 43.316,17.301 J1.2
C3: J6.5 U3.54 | length 6.8
  Top Layer w0.254: U3.54 34.782,30.747 35.315,31.28 J6.5
C4: J6.4 U3.53 | length 7.7
  Top Layer w0.254: U3.53 35.29,28.902 J6.4
C5: J6.6 U3.55 | length 7.2
  Top Layer w0.254: J6.6 32.775,28.867 34.299,27.343 U3.55
C6: J7.1 U3.56 | length 8.3
  Top Layer w0.254: J7.1 30.299,30.895 30.299,30.693 33.791,27.201 U3.56
C7: J1.1 U3.1 | length 35.3
  Top Layer w0.279: U3.1 30.237,22.908 v1(30.253,22.924)
  Bottom Layer w0.279: v1(30.253,22.924) 30.262,22.914 38.903,22.914 45.856,15.961 J1.1
C8: J4.6 U3.41 | length 11.2
  Top Layer w0.279: U3.41 43.965,19.402 48.392,14.975 J4.6
C9: J2.2 U3.26 | length 24.6
  Top Layer w0.279: v1(33.878,15.839) 33.878,15.114 34.299,14.693 U3.26
  Int3 (Sign) w0.279: J2.2 19.948,4.209 32.295,16.556 33.161,16.556 v1(33.878,15.839)
D+: R3.2 U3.5 | length 18.4
  Top Layer w0.254: R3.2 14.279,20.485 14.279,20.599 13.803,21.075 13.803,22.816 13.952,22.964 15.243,22.964 16.703,21.504 v1(16.703,20.948) ; v1(26.528,20.948) 26.575,20.901 U3.5
  Int2 (Sign) w0.254: v1(16.703,20.948) v1(26.528,20.948)
D-: R2.2 U3.6 | length 18.3
  Top Layer w0.254: R2.2 14.961,21.708 15.731,21.708 15.935,21.504 15.935,19.504 16.324,19.114 17.355,19.114 17.653,19.412 17.653,20.197 17.504,20.346 v1(16.703,20.346) ; v1(26.528,20.346) 26.575,20.393 U3.6
  Int2 (Sign) w0.254: v1(16.703,20.346) v1(26.528,20.346)
EXTAL32: U3.20 Y1.1 | length 4.2
  Top Layer w0.279: Y1.1 30.703,9.461 30.703,10.789 31.276,11.363 U3.20
GND: C2.1 C3.1 C4.1 C5.1 C6.1 C7.1 C8.1 C10.1 C11.1 FB1.2 J3.5 J3.S J9.4 J9.5 R4.2 S1.3 S1.4 U1.2 U1.17 U2.2 U2.7 U3.4 U3.31 U3.47 Y2.2 Y2.4 | length 147.4
  Top Layer w0.254: C5.1 24.951,20.672 25.474,21.195 25.474,21.245 25.638,21.409 U3.4 35.812,21.409 ; U3.31 36.788,14.538 ; v1(37.528,8.094) 37.528,8.215 37.553,8.24 37.553,9.089 ; U3.47 36.803,22.4 35.812,21.409 ; Y2.4 39.703,10.535 v1(39.703,12.689) 39.703,13.639 38.453,14.889 37.14,14.889 36.788,14.538 ; 35.812,21.409 35.812,17.864 36.537,17.139 36.537,14.789 36.788,14.538
  Top Layer w0.33: J9.5 J9.4 6.775,1.573 7.11,1.238 7.179,1.238 7.803,0.614 10.085,0.614 10.278,0.808 10.278,3.814 9.484,4.609 8.693,4.609 S1.3 8.482,5.069 9.003,5.59 9.253,5.59 10.452,6.789 12.278,6.789 12.963,7.474 U2.2 12.963,9.611 U2.7 13.3,9.325 14.294,9.325 14.779,8.839 15.652,8.839 C11.1 16.052,8.439 17.728,8.439 19.148,9.859 ; J3.S@9.074,25.376 3.624,25.376 3.624,16.476 9.074,16.476 8.853,16.255 8.853,14.29 S1.4 9.783,13.919 v1(11.503,15.639) ; J3.5 10.604,19.326 10.941,18.989 13.831,18.989 14.727,18.093 ; C4.1 19.136,20.672 18.651,20.187 18.651,19.887 17.178,18.414 v1(15.928,18.414) 15.048,18.414 14.727,18.093 ; C10.1 22.577,11.229 21.208,9.859 19.148,9.859 ; U1.17 35.54,9.208 U1.2 37.434,9.208 37.553,9.089 ; Y2.4 40.3,9.938 40.9,9.938 41.595,9.243 41.595,9.143 42.03,8.708 Y2.2 ; 14.727,18.093 14.727,17.041 C8.1 C6.1 C7.1 18.767,13.306 FB1.2 19.148,9.859
  Top Layer w0.381: R4.2 18.867,23.67 18.208,23.67 17.803,23.264 17.803,21.264 18.138,20.93 18.929,20.93 C4.1 C3.1 C2.1 C5.1
  Int2 (Sign) w0.254: v1(37.528,8.094) 37.528,8.089 38.403,7.214 40.278,7.214 41.078,8.014 41.078,12.164 40.553,12.689 v1(39.703,12.689)
  Bottom Layer w0.33: v1(11.503,15.639) 12.203,16.339 14.878,16.339 15.928,17.389 v1(15.928,18.414)
ID: J3.4 U1.6 U3.23 | length 35.1
  Top Layer w0.254: J3.4 10.941,20.126 v1(11.278,19.789) ; v1(32.722,15.636) 32.706,15.621 32.706,14.716 32.762,14.66 32.762,13.446 U3.23 ; v1(35.228,11.989) 35.54,11.678 U1.6
  Int2 (Sign) w0.254: v1@11.258,19.77 v1(11.278,19.789) ; v1(32.722,15.636) 32.669,15.584 32.669,13.748 34.428,11.989 v1(35.228,11.989)
  Int2 (Sign) w0.381: v1@11.258,19.77 11.258,17.834 13.456,15.636 v1(32.722,15.636)
LED: D3.1 J6.1 U3.50 | length 28.8
  Top Layer w0.279: D3.1 27.877,24.99 29.128,23.739 34.903,23.739 35.466,23.177 36.565,23.177 36.803,23.414 36.803,24.17 36.788,24.185 U3.50 36.788,27.525 39.303,30.039 44.803,30.039 45.277,30.513 45.277,31.269 J6.1
NetC9_1: C9.1 U3.17 | length 6.8
  Top Layer w0.254: C9.1 24.238,14.764 29.428,14.764 29.778,14.415 U3.17
NetC10_2: C10.2 D1.2 D2.2 U3.21 | length 35.4
  Top Layer w0.254: v1(15.878,24.589) 15.878,25.949 D1.2 ; C10.2 24.513,12.589 v1(26.253,12.589) ; v1(28.078,8.714) 28.884,7.908 30.703,7.908 31.784,8.99 U3.21
  Top Layer w0.381: D1.2 D2.2
  Int2 (Sign) w0.254: v1(26.253,12.589) 26.253,10.539 v1(28.078,8.714)
  Int3 (Sign) w0.254: v1(15.878,24.589) 15.878,22.964 v1(26.253,12.589)
NetD3_2: D3.2 R4.1 | length 2.6
  Top Layer w0.254: R4.1 19.634,25.29 20.234,25.29 20.534,24.99 D3.2
NetJ3_2: J3.2 R2.1 | length 3.9
  Top Layer w0.254: J3.2 9.187,21.708 11.378,21.708 11.612,21.942 R2.1
NetJ3_3: J3.3 R3.1 | length 4.2
  Top Layer w0.254: J3.3 11.091,20.926 11.98,20.037 R3.1
NetR1_1: R1.1 U3.14 | length 6.9
  Top Layer w0.254: R1.1 22.502,17.465 23.562,16.405 U3.14
OSC1: U3.32 Y2.1 | length 5.9
  Top Layer w0.279: U3.32 37.296,12.096 38.861,10.531 38.861,9.677 39.83,8.708 Y2.1
OSC2: U3.33 Y2.3 | length 7
  Top Layer w0.279: U3.33 40.528,15.389 42.13,13.787 Y2.3
PROG: J9.3 S1.1 S1.2 U1.10 | length 43.9
  Top Layer w0.279: S1.2 3.982,4.583 5.276,3.289 7.31,3.289 J9.3 ; v1(32.578,9.889) 32.665,9.889 32.846,9.708 U1.10
  Int2 (Sign) w0.279: J9.3 14.8,7.347 30.036,7.347 v1(32.578,9.889)
PTA4: J8.6 U1.4 U1.13 U3.34 | length 70.6
  Top Layer w0.254: U1.13 34.54,7.178 35.203,6.514 36.828,6.514 37.978,7.664 37.978,8.439 ; U1.4 37.829,10.208 37.978,10.06 37.978,8.439 ; v1(36.966,15.889) 36.97,15.893 39.248,15.893 U3.34 40.695,15.897 43.503,13.089 43.503,8.437 42.13,7.064 39.353,7.064 37.978,8.439
  Int3 (Sign) w0.254: J8.6 6.075,26.671 27.821,26.671 36.953,17.539 36.953,15.903 v1(36.966,15.889)
PTA7: U1.7 U3.25 | length 2.9
  Top Layer w0.279: U3.25 33.791,12.604 35.036,11.36 35.036,11.012 U1.7
PTB0: U1.8 U3.22 | length 4
  Top Layer w0.254: U3.22 32.292,12.4 32.553,12.139 33.616,12.139 34.531,11.225 34.531,11.017 U1.8
PTB1: U1.9 U3.24 | length 7.8
  Top Layer w0.254: v1(32.714,11.36) 32.778,11.295 32.778,10.514 33.084,10.208 U1.9 ; v1(33.22,14.889) 33.27,14.839 33.27,13.446 U3.24
  Int3 (Sign) w0.254: v1(32.714,11.36) 32.778,11.424 32.778,12.089 33.878,13.189 33.878,14.339 33.501,14.716 33.487,14.716 33.314,14.889 v1(33.22,14.889)
V_USB: C6.2 C7.2 C8.2 J3.1 J8.4 U2.1 U2.6 | length 35.7
  Top Layer w0.381: J8.4 11.053,26.773 11.053,22.964 10.615,22.526 J3.1 9.116,22.473 7.576,22.473 7.353,22.25 7.353,19.408 8.496,18.264 12.878,18.264 13.105,18.038 13.105,17.064 C8.2 C6.2 C7.2 13.179,13.256 12.72,12.797 12.67,12.797 12.023,12.151 U2.6 11.297,11.058 10.803,10.564 10.803,8.839 11.378,8.264 U2.1
VBAT: D1.1 J9.6 | length 29.2
  Top Layer w0.279: D1.1 12.828,25.963 v1(12.828,24.564)
  Int3 (Sign) w0.279: J9.6 1.406,9.142 12.878,20.614 12.878,24.514 v1(12.828,24.564)
VDDA: C1.1 FB2.2 J8.5 R1.2 U3.13 | length 34.9
  Top Layer w0.254: 25.905,16.888 U3.13
  Top Layer w0.381: v1(16.953,16.889) 18.994,16.889 C1.1 19.608,17.195 19.608,17.372 20.289,18.053 20.289,18.181 FB2.2 20.748,18.69 21.722,19.664 23.328,19.664 23.868,19.125 24.252,18.74 24.252,18.54 25.905,16.888
  Int2 (Sign) w0.381: J8.5 12.928,22.358 12.928,18.689 14.728,16.889 v1(16.953,16.889)
VSSA: C1.2 C9.2 FB1.1 U3.15 U3.16 | length 12.7
  Top Layer w0.254: C9.2 22.577,14.753 23.1,15.276 23.15,15.276 23.771,15.897 U3.15 U3.16
  Top Layer w0.381: C1.2 FB1.1 20.748,12.975 21.208,13.435 21.258,13.435 22.017,14.194 22.118,14.194 22.577,14.653 C9.2
XTAL32: U3.19 Y1.2 | length 4.6
  Top Layer w0.279: Y1.2 29.256,10.942 30.794,12.48 U3.19
pads on no net: J3.M U1.3 U1.5 U1.11 U1.12 U1.14 U1.15 U1.16 U2.3 U3.8
copper on no net: | length 167.3
  Top Layer w0.1: -0.372,0.898 ccw(c0.898,0.898) 0.898,-0.372 49.383,-0.372 ccw(c49.383,0.898) 50.653,0.898 50.653,32.069 ccw(c49.433,32.069) 49.433,33.289 0.625,33.289 ccw(c0.625,32.293) -0.372,32.293 -0.372,0.898

## Polygon pours and split planes (outlines as drawn)
GND on Bottom Layer "GND_L06_P006" (solid, pour order 6): 10.203,14.764 16.503,14.764 16.503,19.214 10.203,19.214
no net on Bottom Layer "NONET_L06_P000" (solid, pour order 0): -0.372,37.69
+3V3 on Int2 (Sign) "+3V3_L03_P012" (solid, remove dead copper, pour order 12): 33.728,24.589 41.478,24.589 41.478,19.739 33.728,19.739
GND on Int2 (Sign) "GND_L03_P008" (solid, pour order 8): 16.453,11.389 19.053,11.489 19.053,6.814 16.478,6.814 16.478,11.389
GND on Int2 (Sign) "GND_L03_P007" (solid, pour order 7): 36.228,8.814 36.228,6.364 42.003,6.364 42.003,13.389 39.228,13.389 39.228,9.914
+3V3 on Int3 (Sign) "+3V3_L04_P014" (solid, pour order 14): 14.578,27.939 14.578,0.125 40.278,0.125 40.278,10.114 35.203,10.114 35.203,1.573 21.228,1.573 21.228,21.414 29.303,21.414 29.303,27.939
+3V3 on Int3 (Sign) "+3V3_L04_P013" (solid, pour order 13): 14.955,23.351
GND on Top Layer "GND_L01_P004" (solid, pour order 4): -0.372,32.293 cw(c0.625,32.293) 0.625,33.289 49.433,33.289 cw(c49.433,32.069) 50.653,32.069 50.653,0.898 cw(c49.383,0.898) 49.383,-0.372 0.898,-0.372 cw(c0.898,0.898) -0.372,0.898
GND on Int1 (GND) (split plane): 49.544,32.772 49.653,32.746 49.756,32.703 49.851,32.645 49.936,32.573 50.009,32.488 50.067,32.392 50.11,32.289 50.136,32.181 50.144,32.081 50.143,32.069 50.143,0.898 50.144,0.885 50.135,0.779 50.108,0.663 50.062,0.552 49.999,0.45 49.922,0.359 49.831,0.282 49.729,0.219 49.618,0.173 49.502,0.146 49.396,0.137 49.383,0.138 0.898,0.138 0.885,0.137 0.779,0.146 0.663,0.173 0.552,0.219 0.45,0.282 0.359,0.359 0.282,0.45 0.219,0.552 0.173,0.663 0.146,0.779 0.137,0.885 0.138,0.898 0.138,32.293 0.137,32.304 0.146,32.388 0.173,32.48 0.219,32.564 0.279,32.638 0.353,32.699 0.438,32.744 0.529,32.772 0.613,32.78 0.625,32.779 49.433,32.779 49.445,32.78
A0 on Int4 (PWR) (split plane): 49.544,32.772 49.653,32.746 49.756,32.703 49.851,32.645 49.936,32.573 50.009,32.488 50.067,32.392 50.11,32.289 50.136,32.181 50.144,32.081 50.143,32.069 50.143,0.898 50.144,0.885 50.135,0.779 50.108,0.663 50.062,0.552 49.999,0.45 49.922,0.359 49.831,0.282 49.729,0.219 49.618,0.173 49.502,0.146 49.396,0.137 49.383,0.138 0.898,0.138 0.885,0.137 0.779,0.146 0.663,0.173 0.552,0.219 0.45,0.282 0.359,0.359 0.282,0.45 0.219,0.552 0.173,0.663 0.146,0.779 0.137,0.885 0.138,0.898 0.138,32.293 0.137,32.304 0.146,32.388 0.173,32.48 0.219,32.564 0.279,32.638 0.353,32.699 0.438,32.744 0.529,32.772 0.613,32.78 0.625,32.779 49.433,32.779 49.445,32.78

## Silkscreen, mask and mechanical layers (free items; w line width, h text height)
Top Overlay:
  text "PTC11" at 29.858,30.269 h0.76 r270
  text "PTC10" at 32.458,30.191 h0.76 r270
  text "PTD4" at 17.027,30.126 h0.76 r270
  text "PTD3" at 19.633,30.127 h0.76 r270
  text "PTD2" at 22.107,30.124 h0.76 r270
  text "PTD0" at 27.195,30.126 h0.76 r270
  text "PTD1" at 24.647,30.08 h0.76 r270
  text "PTC9" at 35.008,30.003 h0.76 r270
  text "PTC8" at 37.533,30.003 h0.76 r270
  text "PTC7" at 40.133,30.002 h0.76 r270
  text "PTC6" at 42.633,30.002 h0.76 r270
  text "PTC5" at 44.782,30.004 h0.76 r270
  text "PTC4" at 45.61,29.623 h0.76
  text "P_8" at 0.711,29.591 h0.76
  text "V_USB" at 5.405,29.588 h0.76
  text "VDDA" at 2.876,29.525 h0.76
  text "PTD7" at 8.248,29.525 h0.76
  text "PTD6" at 10.648,29.528 h0.76
  text "PTD5" at 13.25,29.529 h0.76
  text "PTC3" at 45.398,27.658 h0.76
  text "MK20DX256VLH7" at 29.321,26.204 h1.27
  text "PTC2" at 45.4,25.108 h0.76
  text "MK20DX256VLH7 I/O pins, please" at 42.985,23.173 h0.76 r270
  text "PTC1" at 45.444,22.633 h0.76
  text "For more information about" at 43.583,22.046 h0.76 r270
  text "refer the datasheet" at 42.408,20.83 h0.76 r270
  text "on NXP web site." at 41.758,20.543 h0.76 r270
  text "PTC0" at 45.398,20.133 h0.76
  text "PTB19" at 45.226,17.633 h0.76
  text "PTB18" at 45.126,14.908 h0.76
  text "PTB17" at 45.127,12.3 h0.76
  text "PTB16" at 45.127,9.633 h0.76
  text "PTB3" at 45.316,7.364 h0.76
  text "MKL02Z32VFG4" at 33,6.733 h0.76
  text "Designed by Alper Inci" at 0.582,6.421 h0.76 r90
  text "VREF_OUT" at 17.36,5.93 h0.76 r270
  text "PGA0_DM" at 37.91,5.948 h0.76 r270
  text "PGA0_DP" at 40.51,5.953 h0.76 r270
  text "PGA1_DM" at 32.76,5.748 h0.76 r270
  text "PGA1_DP" at 35.285,5.728 h0.76 r270
  text "PTA12" at 25.07,4.923 h0.76 r270
  text "PTA13" at 27.657,4.925 h0.76 r270
  text "PTB2" at 45.318,4.815 h0.76
  text "PTE1" at 43.2,4.762 h0.76 r270
  text "PTA4" at 19.944,4.735 h0.76 r270
  text "PTA5" at 22.506,4.738 h0.76 r270
  text "PTB0" at 29.883,4.735 h0.76 r270
  text "PTE0" at 45.033,4.558 h0.76 r270
  text "VBAT" at 0.52,3.05 h0.76
  text "GND" at 3.227,3.05 h0.76
  text "GND" at 5.631,3.05 h0.76
  text "PROG" at 8.121,3.05 h0.76
  text "3.3V" at 10.968,3.053 h0.76
  text "3.3V" at 13.368,3.053 h0.76
  text "PTB1" at 46.013,2.85 h0.76

## Dimensions
0.898,-0.372 to 0.625,33.289 on Top Layer
-0.372,0.898 to 50.653,0.898 on Top Layer